# EAGLE board OpenSegment-Panel-v14 (EAGLE 6.5.0), part 1 of 3
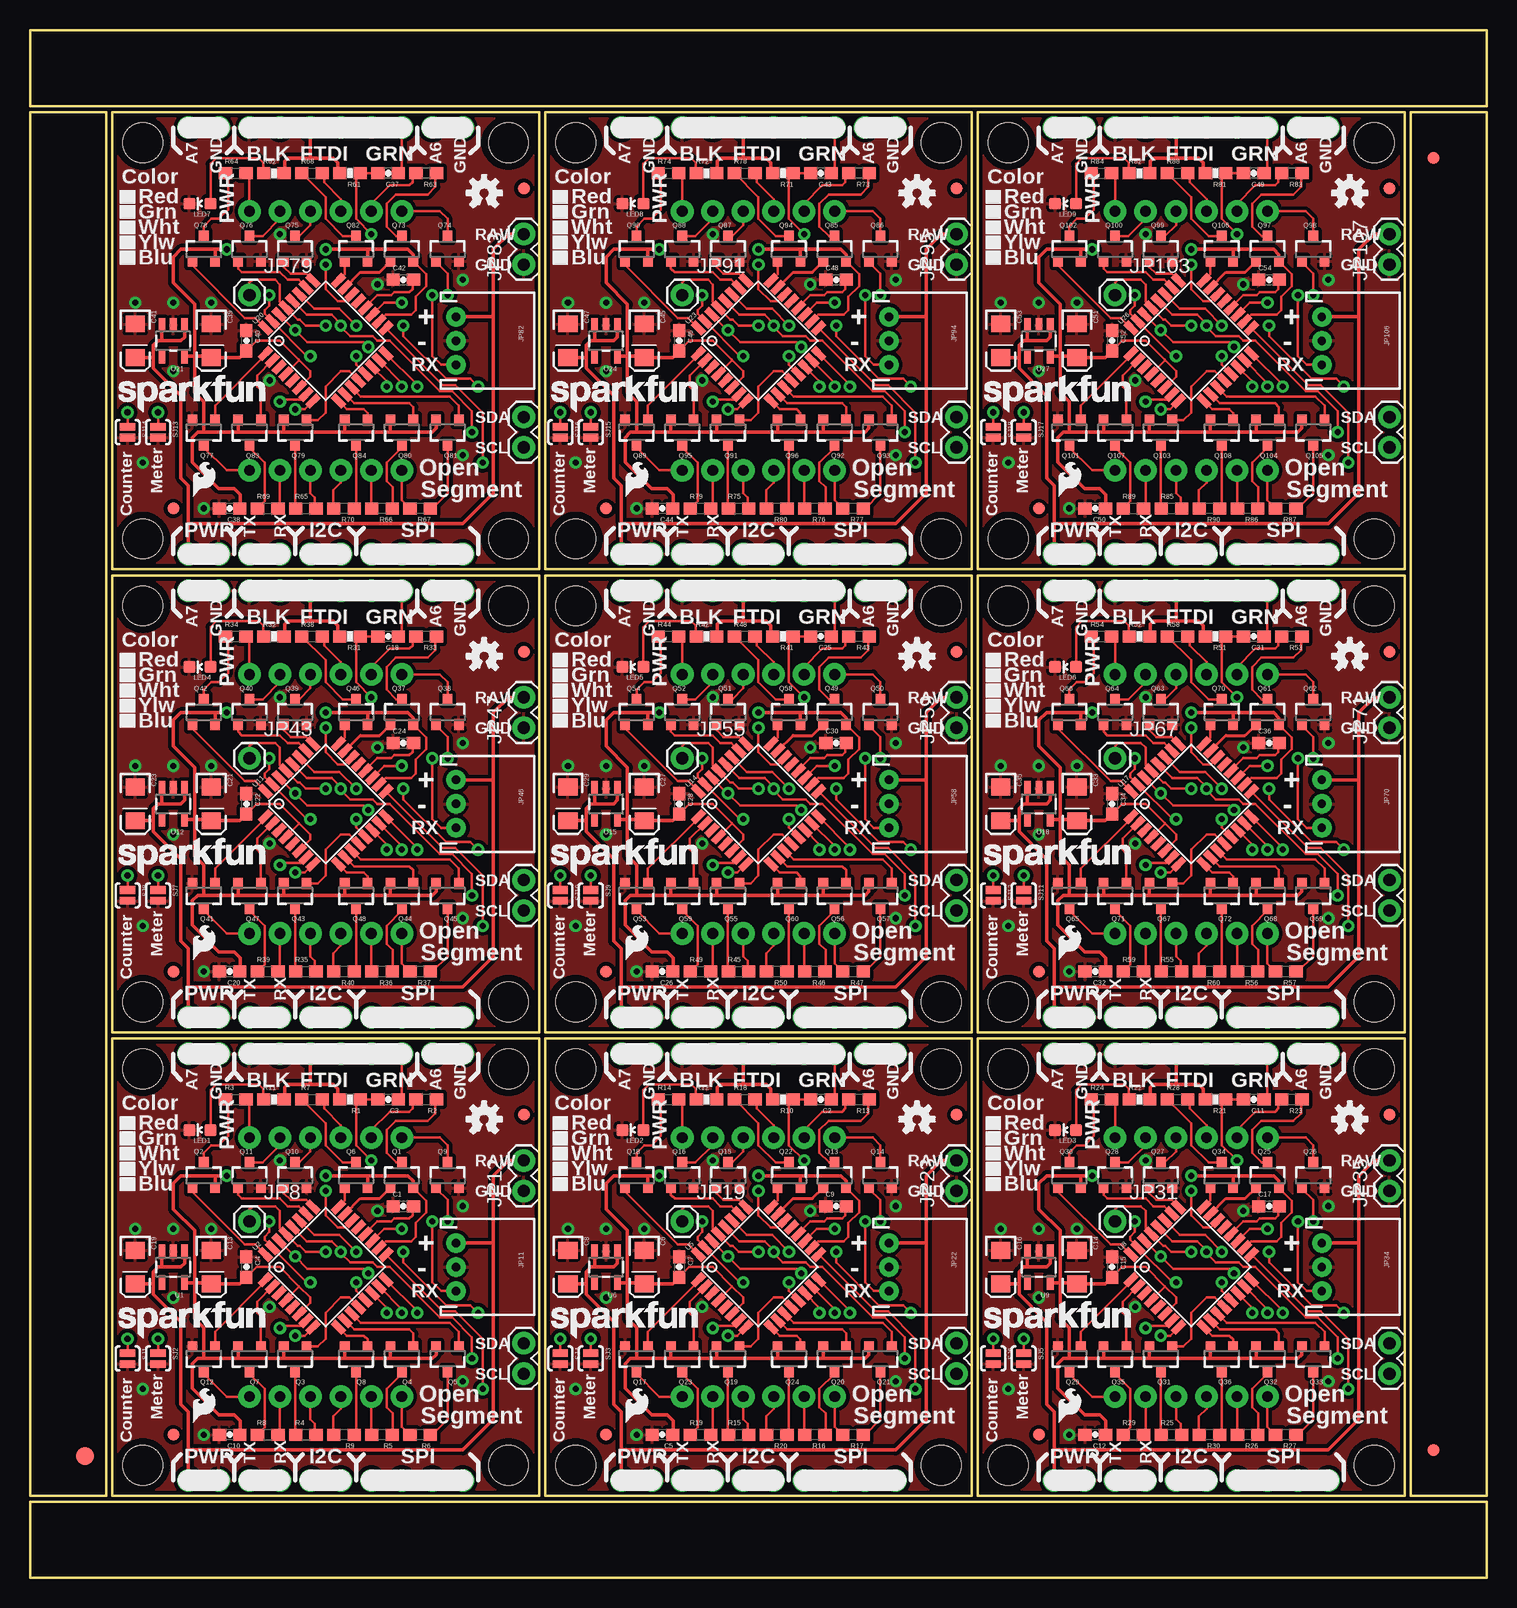
[diagram p0: board, top side]
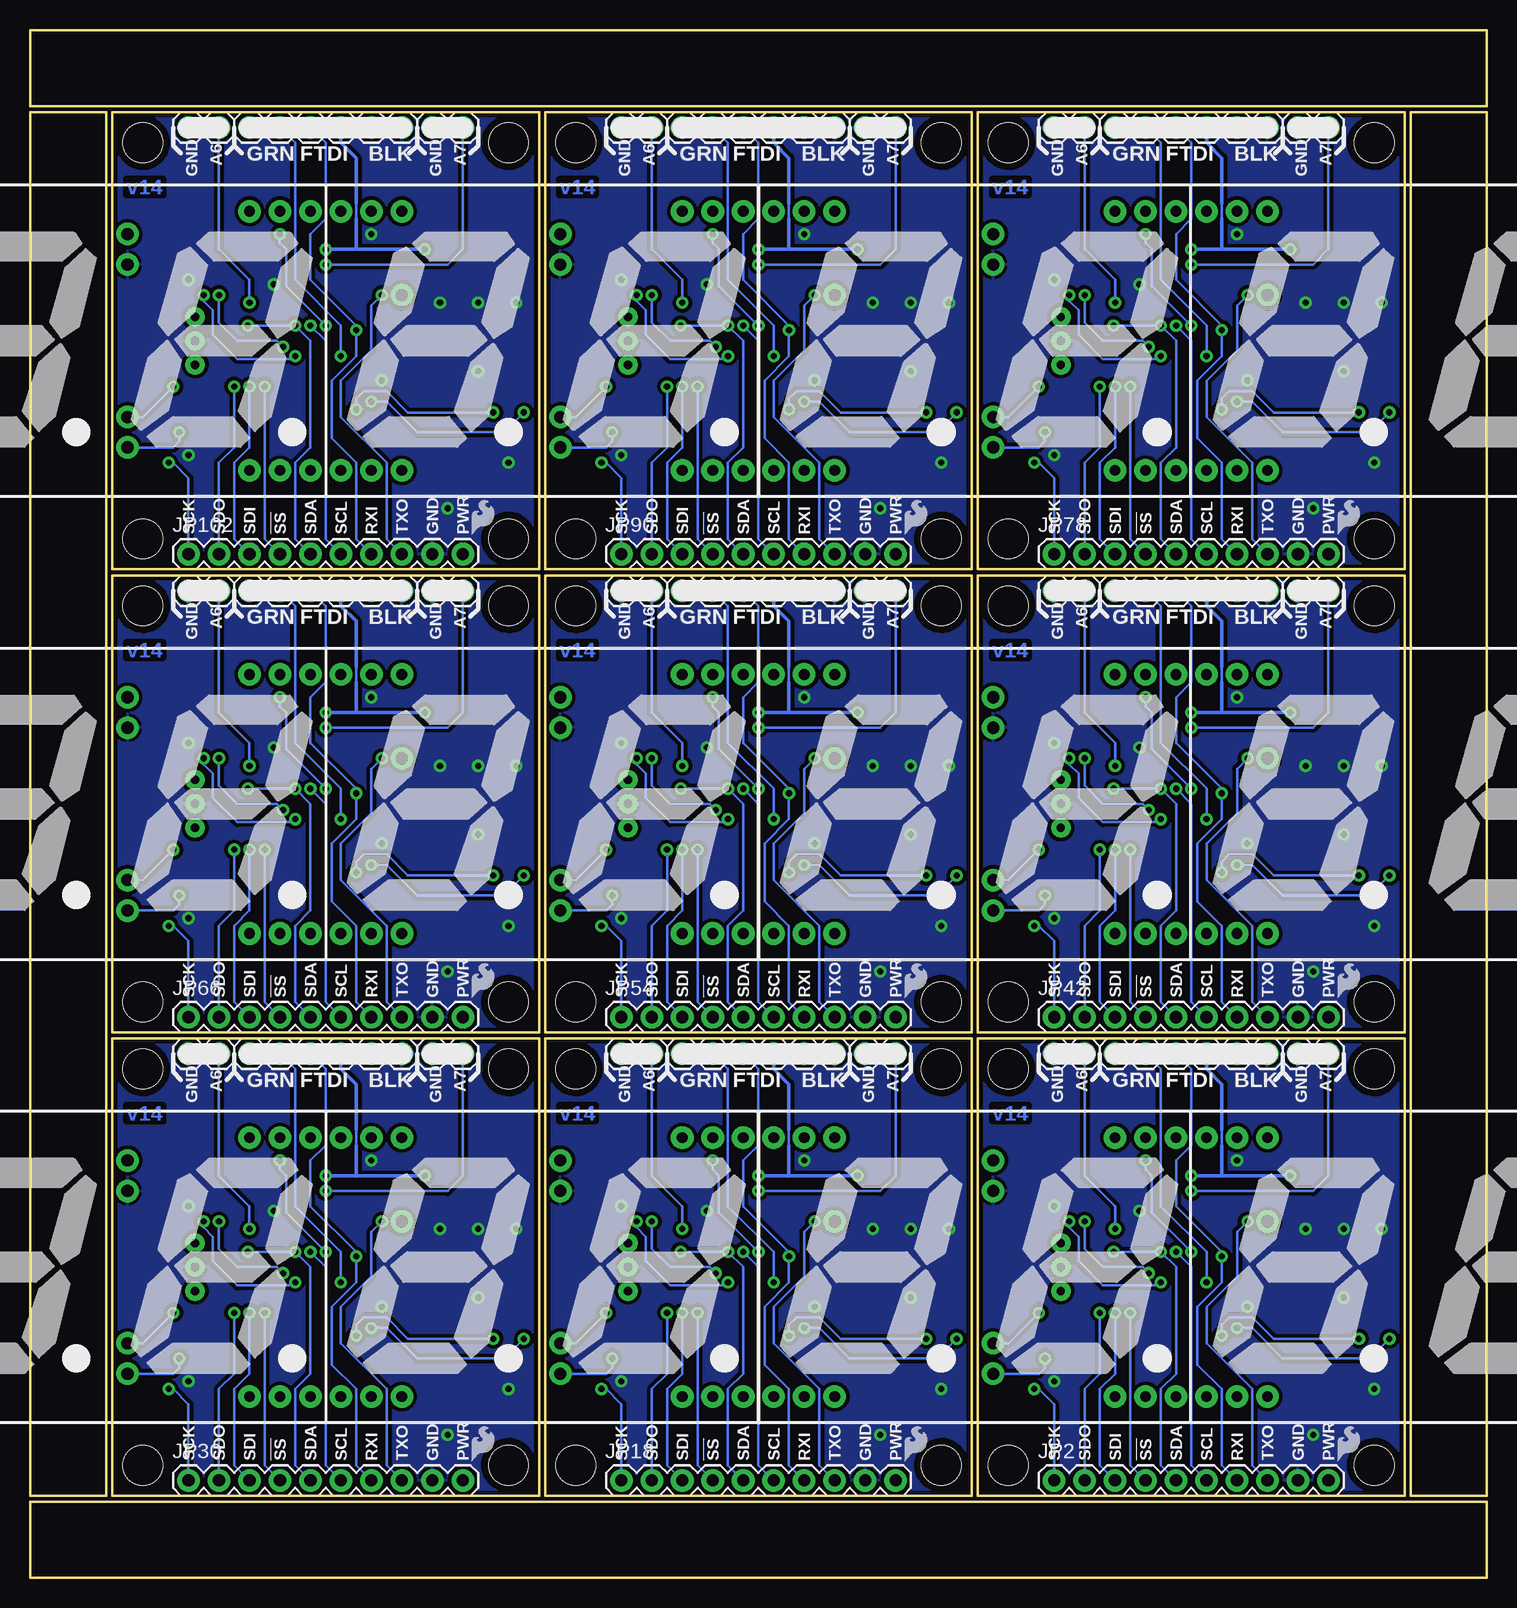
[diagram p1: board, bottom side, seen from below]

Size 121.41 x 129.03 mm. Coordinates in mm from the lower left corner, seen from the top.
Outline: 42.42,44.96 42.42,6.86 6.86,6.86 6.86,44.96 42.42,44.96
Outline: 78.49,44.96 78.49,6.86 42.93,6.86 42.93,44.96 78.49,44.96
Outline: 114.55,44.96 114.55,6.86 78.99,6.86 78.99,44.96 114.55,44.96
Outline: 42.42,83.57 42.42,45.47 6.86,45.47 6.86,83.57 42.42,83.57
Outline: 78.49,83.57 78.49,45.47 42.93,45.47 42.93,83.57 78.49,83.57
Outline: 114.55,83.57 114.55,45.47 78.99,45.47 78.99,83.57 114.55,83.57
Outline: 42.42,122.17 42.42,84.07 6.86,84.07 6.86,122.17 42.42,122.17
Outline: 78.49,122.17 78.49,84.07 42.93,84.07 42.93,122.17 78.49,122.17
Outline: 114.55,122.17 114.55,84.07 78.99,84.07 78.99,122.17 114.55,122.17
Outline: 6.35,6.86 6.35,122.17 0,122.17 0,6.86 6.35,6.86
Outline: 0,0 121.41,0 121.41,6.35 0,6.35 0,0
Outline: 121.41,6.86 121.41,122.17 115.06,122.17 115.06,6.86 121.41,6.86
Outline: 121.41,129.03 0,129.03 0,122.68 121.41,122.68 121.41,129.03
Copper layers (1*16): Top 0.035mm / dielectric 1.5mm / Bottom 0.035mm
Design rules "SparkFun-2-layer": minimum track width 7mil, minimum drill 15mil, track to track 8mil, track to pad 8mil, pad to pad 8mil, via to via 8mil, smd to smd 8mil, copper to edge 8mil, drill to drill 8mil, minimum pad ring 12mil, minimum via ring 10mil, stop-mask expansion 4mil, vias tented up to drill 20mil, thermal gap 10mil
Net classes: 0 default: width 0.203 mm

## Footprints (pad centres in the part's own frame; a part is rotated, then mirrored left to right if it is on the bottom)
0603-CAP = smd 1.1 x 1: 1 -0.85,0; 2 0.85,0
EIA3216 = smd 1.4 x 1.6: A 1.4,0; C -1.4,0
FIDUCIAL-1.5X3 = smd 1.5 x 1.5: 1 0,0
FIDUCIAL-1X2 = smd 1 x 1: 1 0,0
FTDI_BASIC = drill 1.016 pad 1.88: CTS 10.16,0; DTR 0,0; GND 12.7,0; RXI 2.54,0; TXO 5.08,0; VCC 7.62,0
1X10 = drill 1.016 pad 1.88: 1 0,0; 2 2.54,0; 3 5.08,0; 4 7.62,0; 5 10.16,0; 6 12.7,0; 7 15.24,0; 8 17.78,0; 9 20.32,0; 10 22.86,0
STAND-OFF = hole 3.302: 0,0
1X01 = drill 1.016 pad 1.88: 1 0,0
1X02 = drill 1.016 pad 1.88: 1 0,0; 2 2.54,0
JST-3-PTH = drill 0.7 pad 1.626: 1 -2,-5; 2 0,-5; 3 2,-5
LED-0603 = smd 1 x 1: A 0,-0.877; C 0,0.877
SOT23-3 = smd 0.8 x 0.9: 1 -0.95,-1; 2 0.95,-1; 3 0,1.1
0603-RES = smd 1.1 x 1: 1 -0.85,0; 2 0.85,0
0603 = smd 1.1 x 1: 1 -0.85,0; 2 0.85,0
SJ_2S-NO = smd 0.635 x 1.27: 1 -0.45,0; 2 0.45,0
SOT23-5 = smd 0.55 x 1.2: 1 -0.95,-1.3; 2 0,-1.3; 3 0.95,-1.3; 4 0.95,1.3; 5 -0.95,1.3
TQFP32-08 = smd 1.27 x 0.559: 1 -4.293,2.8; 2 -4.293,2; 3 -4.293,1.2; 4 -4.293,0.4; 5 -4.293,-0.4; 6 -4.293,-1.2; 7 -4.293,-2; 8 -4.293,-2.8; 17 4.293,-2.8; 18 4.293,-2; 19 4.293,-1.2; 20 4.293,-0.4; 21 4.293,0.4; 22 4.293,1.2; 23 4.293,2; 24 4.293,2.8 | smd 0.559 x 1.27: 9 -2.8,-4.293; 10 -2,-4.293; 11 -1.2,-4.293; 12 -0.4,-4.293; 13 0.4,-4.293; 14 1.2,-4.293; 15 2,-4.293; 16 2.8,-4.293; 25 2.8,4.293; 26 2,4.293; 27 1.2,4.293; 28 0.4,4.293; 29 -0.4,4.293; 30 -1.2,4.293; 31 -2,4.293; 32 -2.8,4.293
7-SEGMENT-4DIGIT-COUNTER = drill 0.9 pad 1.88: 1 -6.35,-10.795; 2 -3.81,-10.795; 3 -1.27,-10.795; 4 1.27,-10.795; 5 3.81,-10.795; 6 6.35,-10.795; 7 6.35,10.795; 8 3.81,10.795; 9 1.27,10.795; 10 -1.27,10.795; 11 -3.81,10.795; 12 -6.35,10.795

## Placement (x,y rotation side)
C1  0.1uF  [0603-CAP]  31.11,30.99 0 top
C2  0.1uF  [0603-CAP]  65.91,39.88 180 top
C3  0.1uF  [0603-CAP]  29.84,39.88 180 top
C4  0.1uF  [0603-CAP]  18.03,25.91 270 top
C5  1uF  [0603-CAP]  52.7,11.94 180 top
C6  10uF  [EIA3216]  51.18,25.91 270 top
C7  0.1uF  [0603-CAP]  54.1,25.91 270 top
C8  10uF  [EIA3216]  44.83,25.91 270 top
C9  0.1uF  [0603-CAP]  67.18,30.99 0 top
C10  1uF  [0603-CAP]  16.64,11.94 180 top
C11  0.1uF  [0603-CAP]  101.98,39.88 180 top
C12  1uF  [0603-CAP]  88.77,11.94 180 top
C13  10uF  [EIA3216]  15.11,25.91 270 top
C14  10uF  [EIA3216]  87.25,25.91 270 top
C15  0.1uF  [0603-CAP]  90.17,25.91 270 top
C16  10uF  [EIA3216]  80.9,25.91 270 top
C17  0.1uF  [0603-CAP]  103.25,30.99 0 top
C18  0.1uF  [0603-CAP]  29.84,78.49 180 top
C19  10uF  [EIA3216]  8.76,25.91 270 top
C20  1uF  [0603-CAP]  16.64,50.55 180 top
C21  10uF  [EIA3216]  15.11,64.52 270 top
C22  0.1uF  [0603-CAP]  18.03,64.52 270 top
C23  10uF  [EIA3216]  8.76,64.52 270 top
C24  0.1uF  [0603-CAP]  31.11,69.6 0 top
C25  0.1uF  [0603-CAP]  65.91,78.49 180 top
C26  1uF  [0603-CAP]  52.7,50.55 180 top
C27  10uF  [EIA3216]  51.18,64.52 270 top
C28  0.1uF  [0603-CAP]  54.1,64.52 270 top
C29  10uF  [EIA3216]  44.83,64.52 270 top
C30  0.1uF  [0603-CAP]  67.18,69.6 0 top
C31  0.1uF  [0603-CAP]  101.98,78.49 180 top
C32  1uF  [0603-CAP]  88.77,50.55 180 top
C33  10uF  [EIA3216]  87.25,64.52 270 top
C34  0.1uF  [0603-CAP]  90.17,64.52 270 top
C35  10uF  [EIA3216]  80.9,64.52 270 top
C36  0.1uF  [0603-CAP]  103.25,69.6 0 top
C37  0.1uF  [0603-CAP]  29.84,117.09 180 top
C38  1uF  [0603-CAP]  16.64,89.15 180 top
C39  10uF  [EIA3216]  15.11,103.12 270 top
C40  0.1uF  [0603-CAP]  18.03,103.12 270 top
C41  10uF  [EIA3216]  8.76,103.12 270 top
C42  0.1uF  [0603-CAP]  31.11,108.2 0 top
C43  0.1uF  [0603-CAP]  65.91,117.09 180 top
C44  1uF  [0603-CAP]  52.7,89.15 180 top
C45  10uF  [EIA3216]  51.18,103.12 270 top
C46  0.1uF  [0603-CAP]  54.1,103.12 270 top
C47  10uF  [EIA3216]  44.83,103.12 270 top
C48  0.1uF  [0603-CAP]  67.18,108.2 0 top
C49  0.1uF  [0603-CAP]  101.98,117.09 180 top
C50  1uF  [0603-CAP]  88.77,89.15 180 top
C51  10uF  [EIA3216]  87.25,103.12 270 top
C52  0.1uF  [0603-CAP]  90.17,103.12 270 top
C53  10uF  [EIA3216]  80.9,103.12 270 top
C54  0.1uF  [0603-CAP]  103.25,108.2 0 top
E$1  [FIDUCIAL-1.5X3]  4.57,10.16 0 top
E$4  [FIDUCIAL-1X2]  116.97,10.67 0 top
E$5  [FIDUCIAL-1X2]  116.97,118.36 180 top
FID1  FIDUCIAL1X2  [FIDUCIAL-1X2]  41.15,38.61 0 top
FID2  FIDUCIAL1X2  [FIDUCIAL-1X2]  11.94,11.94 0 top
FID3  FIDUCIAL1X2  [FIDUCIAL-1X2]  77.22,38.61 0 top
FID4  FIDUCIAL1X2  [FIDUCIAL-1X2]  48.01,11.94 0 top
FID5  FIDUCIAL1X2  [FIDUCIAL-1X2]  113.28,38.61 0 top
FID6  FIDUCIAL1X2  [FIDUCIAL-1X2]  84.07,11.94 0 top
FID7  FIDUCIAL1X2  [FIDUCIAL-1X2]  41.15,77.22 0 top
FID8  FIDUCIAL1X2  [FIDUCIAL-1X2]  11.94,50.55 0 top
FID9  FIDUCIAL1X2  [FIDUCIAL-1X2]  77.22,77.22 0 top
FID10  FIDUCIAL1X2  [FIDUCIAL-1X2]  48.01,50.55 0 top
FID11  FIDUCIAL1X2  [FIDUCIAL-1X2]  113.28,77.22 0 top
FID12  FIDUCIAL1X2  [FIDUCIAL-1X2]  84.07,50.55 0 top
FID13  FIDUCIAL1X2  [FIDUCIAL-1X2]  41.15,115.82 0 top
FID14  FIDUCIAL1X2  [FIDUCIAL-1X2]  11.94,89.15 0 top
FID15  FIDUCIAL1X2  [FIDUCIAL-1X2]  77.22,115.82 0 top
FID16  FIDUCIAL1X2  [FIDUCIAL-1X2]  48.01,89.15 0 top
FID17  FIDUCIAL1X2  [FIDUCIAL-1X2]  113.28,115.82 0 top
FID18  FIDUCIAL1X2  [FIDUCIAL-1X2]  84.07,89.15 0 top
JP1  FTDI_BASIC  [FTDI_BASIC]  30.99,43.69 0 bottom
JP2  Connections  [1X10]  36.07,8.13 0 bottom
JP3  STAND-OFF  [STAND-OFF]  39.88,42.42 0 top
JP4  STAND-OFF  [STAND-OFF]  9.4,42.42 0 top
JP5  STAND-OFF  [STAND-OFF]  39.88,9.4 0 top
JP6  STAND-OFF  [STAND-OFF]  9.4,9.4 0 top
JP7  FTDI_BASIC  [FTDI_BASIC]  67.06,43.69 0 bottom
JP8  RESET  [1X01]  18.29,29.72 0 top
JP9  [1X02]  36.07,43.69 0 bottom
JP10  [1X02]  15.75,43.69 0 bottom
JP11  Serial  [JST-3-PTH]  40.51,25.91 270 top
JP12  [1X02]  41.15,32.26 90 top
JP13  [1X02]  41.15,19.56 270 top
JP14  STAND-OFF  [STAND-OFF]  75.95,42.42 0 top
JP15  STAND-OFF  [STAND-OFF]  45.47,42.42 0 top
JP16  STAND-OFF  [STAND-OFF]  75.95,9.4 0 top
JP17  STAND-OFF  [STAND-OFF]  45.47,9.4 0 top
JP18  Connections  [1X10]  72.14,8.13 0 bottom
JP19  RESET  [1X01]  54.36,29.72 0 top
JP20  [1X02]  72.14,43.69 0 bottom
JP21  [1X02]  51.82,43.69 0 bottom
JP22  Serial  [JST-3-PTH]  76.58,25.91 270 top
JP23  [1X02]  77.22,32.26 90 top
JP24  [1X02]  77.22,19.56 270 top
JP25  FTDI_BASIC  [FTDI_BASIC]  103.12,43.69 0 bottom
JP26  STAND-OFF  [STAND-OFF]  112.01,42.42 0 top
JP27  STAND-OFF  [STAND-OFF]  81.53,42.42 0 top
JP28  STAND-OFF  [STAND-OFF]  112.01,9.4 0 top
JP29  STAND-OFF  [STAND-OFF]  81.53,9.4 0 top
JP30  Connections  [1X10]  108.2,8.13 0 bottom
JP31  RESET  [1X01]  90.42,29.72 0 top
JP32  [1X02]  108.2,43.69 0 bottom
JP33  [1X02]  87.88,43.69 0 bottom
JP34  Serial  [JST-3-PTH]  112.65,25.91 270 top
JP35  [1X02]  113.28,32.26 90 top
JP36  [1X02]  113.28,19.56 270 top
JP37  FTDI_BASIC  [FTDI_BASIC]  30.99,82.3 0 bottom
JP38  STAND-OFF  [STAND-OFF]  39.88,81.03 0 top
JP39  STAND-OFF  [STAND-OFF]  9.4,81.03 0 top
JP40  STAND-OFF  [STAND-OFF]  39.88,48.01 0 top
JP41  STAND-OFF  [STAND-OFF]  9.4,48.01 0 top
JP42  Connections  [1X10]  36.07,46.74 0 bottom
JP43  RESET  [1X01]  18.29,68.33 0 top
JP44  [1X02]  36.07,82.3 0 bottom
JP45  [1X02]  15.75,82.3 0 bottom
JP46  Serial  [JST-3-PTH]  40.51,64.52 270 top
JP47  [1X02]  41.15,70.87 90 top
JP48  [1X02]  41.15,58.17 270 top
JP49  FTDI_BASIC  [FTDI_BASIC]  67.06,82.3 0 bottom
JP50  STAND-OFF  [STAND-OFF]  75.95,81.03 0 top
JP51  STAND-OFF  [STAND-OFF]  45.47,81.03 0 top
JP52  STAND-OFF  [STAND-OFF]  75.95,48.01 0 top
JP53  STAND-OFF  [STAND-OFF]  45.47,48.01 0 top
JP54  Connections  [1X10]  72.14,46.74 0 bottom
JP55  RESET  [1X01]  54.36,68.33 0 top
JP56  [1X02]  72.14,82.3 0 bottom
JP57  [1X02]  51.82,82.3 0 bottom
JP58  Serial  [JST-3-PTH]  76.58,64.52 270 top
JP59  [1X02]  77.22,70.87 90 top
JP60  [1X02]  77.22,58.17 270 top
JP61  FTDI_BASIC  [FTDI_BASIC]  103.12,82.3 0 bottom
JP62  STAND-OFF  [STAND-OFF]  112.01,81.03 0 top
JP63  STAND-OFF  [STAND-OFF]  81.53,81.03 0 top
JP64  STAND-OFF  [STAND-OFF]  112.01,48.01 0 top
JP65  STAND-OFF  [STAND-OFF]  81.53,48.01 0 top
JP66  Connections  [1X10]  108.2,46.74 0 bottom
JP67  RESET  [1X01]  90.42,68.33 0 top
JP68  [1X02]  108.2,82.3 0 bottom
JP69  [1X02]  87.88,82.3 0 bottom
JP70  Serial  [JST-3-PTH]  112.65,64.52 270 top
JP71  [1X02]  113.28,70.87 90 top
JP72  [1X02]  113.28,58.17 270 top
JP73  FTDI_BASIC  [FTDI_BASIC]  30.99,120.9 0 bottom
JP74  STAND-OFF  [STAND-OFF]  39.88,119.63 0 top
JP75  STAND-OFF  [STAND-OFF]  9.4,119.63 0 top
JP76  STAND-OFF  [STAND-OFF]  39.88,86.61 0 top
JP77  STAND-OFF  [STAND-OFF]  9.4,86.61 0 top
JP78  Connections  [1X10]  36.07,85.34 0 bottom
JP79  RESET  [1X01]  18.29,106.93 0 top
JP80  [1X02]  36.07,120.9 0 bottom
JP81  [1X02]  15.75,120.9 0 bottom
JP82  Serial  [JST-3-PTH]  40.51,103.12 270 top
JP83  [1X02]  41.15,109.47 90 top
JP84  [1X02]  41.15,96.77 270 top
JP85  FTDI_BASIC  [FTDI_BASIC]  67.06,120.9 0 bottom
JP86  STAND-OFF  [STAND-OFF]  75.95,119.63 0 top
JP87  STAND-OFF  [STAND-OFF]  45.47,119.63 0 top
JP88  STAND-OFF  [STAND-OFF]  75.95,86.61 0 top
JP89  STAND-OFF  [STAND-OFF]  45.47,86.61 0 top
JP90  Connections  [1X10]  72.14,85.34 0 bottom
JP91  RESET  [1X01]  54.36,106.93 0 top
JP92  [1X02]  72.14,120.9 0 bottom
JP93  [1X02]  51.82,120.9 0 bottom
JP94  Serial  [JST-3-PTH]  76.58,103.12 270 top
JP95  [1X02]  77.22,109.47 90 top
JP96  [1X02]  77.22,96.77 270 top
JP97  FTDI_BASIC  [FTDI_BASIC]  103.12,120.9 0 bottom
JP98  STAND-OFF  [STAND-OFF]  112.01,119.63 0 top
JP99  STAND-OFF  [STAND-OFF]  81.53,119.63 0 top
JP100  STAND-OFF  [STAND-OFF]  112.01,86.61 0 top
JP101  STAND-OFF  [STAND-OFF]  81.53,86.61 0 top
JP102  Connections  [1X10]  108.2,85.34 0 bottom
JP103  RESET  [1X01]  90.42,106.93 0 top
JP104  [1X02]  108.2,120.9 0 bottom
JP105  [1X02]  87.88,120.9 0 bottom
JP106  Serial  [JST-3-PTH]  112.65,103.12 270 top
JP107  [1X02]  113.28,109.47 90 top
JP108  [1X02]  113.28,96.77 270 top
LED1  Red  [LED-0603]  14.17,37.34 90 top
LED2  Red  [LED-0603]  50.24,37.34 90 top
LED3  Red  [LED-0603]  86.3,37.34 90 top
LED4  Red  [LED-0603]  14.17,75.95 90 top
LED5  Red  [LED-0603]  50.24,75.95 90 top
LED6  Red  [LED-0603]  86.3,75.95 90 top
LED7  Red  [LED-0603]  14.17,114.55 90 top
LED8  Red  [LED-0603]  50.24,114.55 90 top
LED9  Red  [LED-0603]  86.3,114.55 90 top
Q1  PNP  [SOT23-3]  30.99,33.53 0 top
Q2  PNP  [SOT23-3]  14.48,33.53 0 top
Q3  PNP  [SOT23-3]  22.1,18.29 180 top
Q4  PNP  [SOT23-3]  30.99,18.29 180 top
Q5  PNP  [SOT23-3]  34.8,18.29 180 top
Q6  PNP  [SOT23-3]  27.18,33.53 0 top
Q7  PNP  [SOT23-3]  18.29,18.29 180 top
Q8  PNP  [SOT23-3]  27.18,18.29 180 top
Q9  MMBT2222  [SOT23-3]  34.8,33.53 0 top
Q10  MMBT2222  [SOT23-3]  22.1,33.53 0 top
Q11  MMBT2222  [SOT23-3]  18.29,33.53 0 top
Q12  MMBT2222  [SOT23-3]  14.48,18.29 180 top
Q13  PNP  [SOT23-3]  67.06,33.53 0 top
Q14  MMBT2222  [SOT23-3]  70.87,33.53 0 top
Q15  MMBT2222  [SOT23-3]  58.17,33.53 0 top
Q16  MMBT2222  [SOT23-3]  54.36,33.53 0 top
Q17  MMBT2222  [SOT23-3]  50.55,18.29 180 top
Q18  PNP  [SOT23-3]  50.55,33.53 0 top
Q19  PNP  [SOT23-3]  58.17,18.29 180 top
Q20  PNP  [SOT23-3]  67.06,18.29 180 top
Q21  PNP  [SOT23-3]  70.87,18.29 180 top
Q22  PNP  [SOT23-3]  63.25,33.53 0 top
Q23  PNP  [SOT23-3]  54.36,18.29 180 top
Q24  PNP  [SOT23-3]  63.25,18.29 180 top
Q25  PNP  [SOT23-3]  103.12,33.53 0 top
Q26  MMBT2222  [SOT23-3]  106.93,33.53 0 top
Q27  MMBT2222  [SOT23-3]  94.23,33.53 0 top
Q28  MMBT2222  [SOT23-3]  90.42,33.53 0 top
Q29  MMBT2222  [SOT23-3]  86.61,18.29 180 top
Q30  PNP  [SOT23-3]  86.61,33.53 0 top
Q31  PNP  [SOT23-3]  94.23,18.29 180 top
Q32  PNP  [SOT23-3]  103.12,18.29 180 top
Q33  PNP  [SOT23-3]  106.93,18.29 180 top
Q34  PNP  [SOT23-3]  99.31,33.53 0 top
Q35  PNP  [SOT23-3]  90.42,18.29 180 top
Q36  PNP  [SOT23-3]  99.31,18.29 180 top
Q37  PNP  [SOT23-3]  30.99,72.14 0 top
Q38  MMBT2222  [SOT23-3]  34.8,72.14 0 top
Q39  MMBT2222  [SOT23-3]  22.1,72.14 0 top
Q40  MMBT2222  [SOT23-3]  18.29,72.14 0 top
Q41  MMBT2222  [SOT23-3]  14.48,56.9 180 top
Q42  PNP  [SOT23-3]  14.48,72.14 0 top
Q43  PNP  [SOT23-3]  22.1,56.9 180 top
Q44  PNP  [SOT23-3]  30.99,56.9 180 top
Q45  PNP  [SOT23-3]  34.8,56.9 180 top
Q46  PNP  [SOT23-3]  27.18,72.14 0 top
Q47  PNP  [SOT23-3]  18.29,56.9 180 top
Q48  PNP  [SOT23-3]  27.18,56.9 180 top
Q49  PNP  [SOT23-3]  67.06,72.14 0 top
Q50  MMBT2222  [SOT23-3]  70.87,72.14 0 top
Q51  MMBT2222  [SOT23-3]  58.17,72.14 0 top
Q52  MMBT2222  [SOT23-3]  54.36,72.14 0 top
Q53  MMBT2222  [SOT23-3]  50.55,56.9 180 top
Q54  PNP  [SOT23-3]  50.55,72.14 0 top
Q55  PNP  [SOT23-3]  58.17,56.9 180 top
Q56  PNP  [SOT23-3]  67.06,56.9 180 top
Q57  PNP  [SOT23-3]  70.87,56.9 180 top
Q58  PNP  [SOT23-3]  63.25,72.14 0 top
Q59  PNP  [SOT23-3]  54.36,56.9 180 top
Q60  PNP  [SOT23-3]  63.25,56.9 180 top
Q61  PNP  [SOT23-3]  103.12,72.14 0 top
Q62  MMBT2222  [SOT23-3]  106.93,72.14 0 top
Q63  MMBT2222  [SOT23-3]  94.23,72.14 0 top
Q64  MMBT2222  [SOT23-3]  90.42,72.14 0 top
Q65  MMBT2222  [SOT23-3]  86.61,56.9 180 top
Q66  PNP  [SOT23-3]  86.61,72.14 0 top
Q67  PNP  [SOT23-3]  94.23,56.9 180 top
Q68  PNP  [SOT23-3]  103.12,56.9 180 top
Q69  PNP  [SOT23-3]  106.93,56.9 180 top
Q70  PNP  [SOT23-3]  99.31,72.14 0 top
Q71  PNP  [SOT23-3]  90.42,56.9 180 top
Q72  PNP  [SOT23-3]  99.31,56.9 180 top
Q73  PNP  [SOT23-3]  30.99,110.74 0 top
Q74  MMBT2222  [SOT23-3]  34.8,110.74 0 top
Q75  MMBT2222  [SOT23-3]  22.1,110.74 0 top
Q76  MMBT2222  [SOT23-3]  18.29,110.74 0 top
Q77  MMBT2222  [SOT23-3]  14.48,95.5 180 top
Q78  PNP  [SOT23-3]  14.48,110.74 0 top
Q79  PNP  [SOT23-3]  22.1,95.5 180 top
Q80  PNP  [SOT23-3]  30.99,95.5 180 top
Q81  PNP  [SOT23-3]  34.8,95.5 180 top
Q82  PNP  [SOT23-3]  27.18,110.74 0 top
Q83  PNP  [SOT23-3]  18.29,95.5 180 top
Q84  PNP  [SOT23-3]  27.18,95.5 180 top
Q85  PNP  [SOT23-3]  67.06,110.74 0 top
Q86  MMBT2222  [SOT23-3]  70.87,110.74 0 top
Q87  MMBT2222  [SOT23-3]  58.17,110.74 0 top
Q88  MMBT2222  [SOT23-3]  54.36,110.74 0 top
Q89  MMBT2222  [SOT23-3]  50.55,95.5 180 top
Q90  PNP  [SOT23-3]  50.55,110.74 0 top
Q91  PNP  [SOT23-3]  58.17,95.5 180 top
Q92  PNP  [SOT23-3]  67.06,95.5 180 top
Q93  PNP  [SOT23-3]  70.87,95.5 180 top
Q94  PNP  [SOT23-3]  63.25,110.74 0 top
Q95  PNP  [SOT23-3]  54.36,95.5 180 top
Q96  PNP  [SOT23-3]  63.25,95.5 180 top
Q97  PNP  [SOT23-3]  103.12,110.74 0 top
Q98  MMBT2222  [SOT23-3]  106.93,110.74 0 top
Q99  MMBT2222  [SOT23-3]  94.23,110.74 0 top
Q100  MMBT2222  [SOT23-3]  90.42,110.74 0 top
Q101  MMBT2222  [SOT23-3]  86.61,95.5 180 top
Q102  PNP  [SOT23-3]  86.61,110.74 0 top
Q103  PNP  [SOT23-3]  94.23,95.5 180 top
Q104  PNP  [SOT23-3]  103.12,95.5 180 top
Q105  PNP  [SOT23-3]  106.93,95.5 180 top
Q106  PNP  [SOT23-3]  99.31,110.74 0 top
Q107  PNP  [SOT23-3]  90.42,95.5 180 top
Q108  PNP  [SOT23-3]  99.31,95.5 180 top
R1  10k  [0603-RES]  26.67,39.88 180 top
R2  33/68  [0603]  33.02,39.88 180 top
R3  33/68  [0603]  17.14,39.88 0 top
R4  33/68  [0603]  22.99,11.94 0 top
R5  33/68  [0603]  29.34,11.94 180 top
R6  33/68  [0603]  32.51,11.94 180 top
R7  33/68  [0603]  23.5,39.88 0 top
R8  33/68  [0603]  19.81,11.94 0 top
R9  33/68  [0603]  26.16,11.94 180 top
R10  10k  [0603-RES]  62.74,39.88 180 top
R11  330  [0603-RES]  20.32,39.88 0 top
R12  330  [0603-RES]  56.39,39.88 0 top
R13  33/68  [0603]  69.09,39.88 180 top
R14  33/68  [0603]  53.21,39.88 0 top
R15  33/68  [0603]  59.05,11.94 0 top
R16  33/68  [0603]  65.41,11.94 180 top
R17  33/68  [0603]  68.58,11.94 180 top
R18  33/68  [0603]  59.56,39.88 0 top
R19  33/68  [0603]  55.88,11.94 0 top
R20  33/68  [0603]  62.23,11.94 180 top
R21  10k  [0603-RES]  98.81,39.88 180 top
R22  330  [0603-RES]  92.46,39.88 0 top
R23  33/68  [0603]  105.16,39.88 180 top
R24  33/68  [0603]  89.28,39.88 0 top
R25  33/68  [0603]  95.12,11.94 0 top
R26  33/68  [0603]  101.47,11.94 180 top
R27  33/68  [0603]  104.65,11.94 180 top
R28  33/68  [0603]  95.63,39.88 0 top
R29  33/68  [0603]  91.95,11.94 0 top
R30  33/68  [0603]  98.3,11.94 180 top
R31  10k  [0603-RES]  26.67,78.49 180 top
R32  330  [0603-RES]  20.32,78.49 0 top
R33  33/68  [0603]  33.02,78.49 180 top
R34  33/68  [0603]  17.14,78.49 0 top
R35  33/68  [0603]  22.99,50.55 0 top
R36  33/68  [0603]  29.34,50.55 180 top
R37  33/68  [0603]  32.51,50.55 180 top
R38  33/68  [0603]  23.5,78.49 0 top
R39  33/68  [0603]  19.81,50.55 0 top
R40  33/68  [0603]  26.16,50.55 180 top
R41  10k  [0603-RES]  62.74,78.49 180 top
R42  330  [0603-RES]  56.39,78.49 0 top
R43  33/68  [0603]  69.09,78.49 180 top
R44  33/68  [0603]  53.21,78.49 0 top
R45  33/68  [0603]  59.05,50.55 0 top
R46  33/68  [0603]  65.41,50.55 180 top
R47  33/68  [0603]  68.58,50.55 180 top
R48  33/68  [0603]  59.56,78.49 0 top
R49  33/68  [0603]  55.88,50.55 0 top
R50  33/68  [0603]  62.23,50.55 180 top
R51  10k  [0603-RES]  98.81,78.49 180 top
R52  330  [0603-RES]  92.46,78.49 0 top
R53  33/68  [0603]  105.16,78.49 180 top
R54  33/68  [0603]  89.28,78.49 0 top
R55  33/68  [0603]  95.12,50.55 0 top
R56  33/68  [0603]  101.47,50.55 180 top
R57  33/68  [0603]  104.65,50.55 180 top
R58  33/68  [0603]  95.63,78.49 0 top
R59  33/68  [0603]  91.95,50.55 0 top
R60  33/68  [0603]  98.3,50.55 180 top
R61  10k  [0603-RES]  26.67,117.09 180 top
R62  330  [0603-RES]  20.32,117.09 0 top
R63  33/68  [0603]  33.02,117.09 180 top
R64  33/68  [0603]  17.14,117.09 0 top
R65  33/68  [0603]  22.99,89.15 0 top
R66  33/68  [0603]  29.34,89.15 180 top
R67  33/68  [0603]  32.51,89.15 180 top
R68  33/68  [0603]  23.5,117.09 0 top
R69  33/68  [0603]  19.81,89.15 0 top
R70  33/68  [0603]  26.16,89.15 180 top
R71  10k  [0603-RES]  62.74,117.09 180 top
R72  330  [0603-RES]  56.39,117.09 0 top
R73  33/68  [0603]  69.09,117.09 180 top
R74  33/68  [0603]  53.21,117.09 0 top
R75  33/68  [0603]  59.05,89.15 0 top
R76  33/68  [0603]  65.41,89.15 180 top
R77  33/68  [0603]  68.58,89.15 180 top
R78  33/68  [0603]  59.56,117.09 0 top
R79  33/68  [0603]  55.88,89.15 0 top
R80  33/68  [0603]  62.23,89.15 180 top
R81  10k  [0603-RES]  98.81,117.09 180 top
R82  330  [0603-RES]  92.46,117.09 0 top
R83  33/68  [0603]  105.16,117.09 180 top
R84  33/68  [0603]  89.28,117.09 0 top
R85  33/68  [0603]  95.12,89.15 0 top
R86  33/68  [0603]  101.47,89.15 180 top
R87  33/68  [0603]  104.65,89.15 180 top
R88  33/68  [0603]  95.63,117.09 0 top
R89  33/68  [0603]  91.95,89.15 0 top
R90  33/68  [0603]  98.3,89.15 180 top
SJ1  Counter Ctl  [SJ_2S-NO]  8.13,18.29 270 top
SJ2  Counter Ctl  [SJ_2S-NO]  10.67,18.29 270 top
SJ3  Counter Ctl  [SJ_2S-NO]  46.74,18.29 270 top
SJ4  Counter Ctl  [SJ_2S-NO]  44.2,18.29 270 top
SJ5  Counter Ctl  [SJ_2S-NO]  82.8,18.29 270 top
SJ6  Counter Ctl  [SJ_2S-NO]  80.26,18.29 270 top
SJ7  Counter Ctl  [SJ_2S-NO]  10.67,56.9 270 top
SJ8  Counter Ctl  [SJ_2S-NO]  8.13,56.9 270 top
SJ9  Counter Ctl  [SJ_2S-NO]  46.74,56.9 270 top
SJ10  Counter Ctl  [SJ_2S-NO]  44.2,56.9 270 top
SJ11  Counter Ctl  [SJ_2S-NO]  82.8,56.9 270 top
SJ12  Counter Ctl  [SJ_2S-NO]  80.26,56.9 270 top
SJ13  Counter Ctl  [SJ_2S-NO]  10.67,95.5 270 top
SJ14  Counter Ctl  [SJ_2S-NO]  8.13,95.5 270 top
SJ15  Counter Ctl  [SJ_2S-NO]  46.74,95.5 270 top
SJ16  Counter Ctl  [SJ_2S-NO]  44.2,95.5 270 top
SJ17  Counter Ctl  [SJ_2S-NO]  82.8,95.5 270 top
SJ18  Counter Ctl  [SJ_2S-NO]  80.26,95.5 270 top
U1  MIC5219  [SOT23-5]  11.94,25.91 180 top
U2  ATMEGA328  [TQFP32-08]  24.64,25.91 45 top
U3  7-SEGMENT-4DIGIT-COUNTERPTH  [7-SEGMENT-4DIGIT-COUNTER]  24.64,25.91 0 bottom
U4  7-SEGMENT-4DIGIT-COUNTERPTH  [7-SEGMENT-4DIGIT-COUNTER]  60.71,25.91 0 bottom
U5  ATMEGA328  [TQFP32-08]  60.71,25.91 45 top
U6  MIC5219  [SOT23-5]  48.01,25.91 180 top
U7  7-SEGMENT-4DIGIT-COUNTERPTH  [7-SEGMENT-4DIGIT-COUNTER]  96.77,25.91 0 bottom
U8  ATMEGA328  [TQFP32-08]  96.77,25.91 45 top
U9  MIC5219  [SOT23-5]  84.07,25.91 180 top
U10  7-SEGMENT-4DIGIT-COUNTERPTH  [7-SEGMENT-4DIGIT-COUNTER]  24.64,64.52 0 bottom
U11  ATMEGA328  [TQFP32-08]  24.64,64.52 45 top
U12  MIC5219  [SOT23-5]  11.94,64.52 180 top
U13  7-SEGMENT-4DIGIT-COUNTERPTH  [7-SEGMENT-4DIGIT-COUNTER]  60.71,64.52 0 bottom
U14  ATMEGA328  [TQFP32-08]  60.71,64.52 45 top
U15  MIC5219  [SOT23-5]  48.01,64.52 180 top
U16  7-SEGMENT-4DIGIT-COUNTERPTH  [7-SEGMENT-4DIGIT-COUNTER]  96.77,64.52 0 bottom
U17  ATMEGA328  [TQFP32-08]  96.77,64.52 45 top
U18  MIC5219  [SOT23-5]  84.07,64.52 180 top
U19  7-SEGMENT-4DIGIT-COUNTERPTH  [7-SEGMENT-4DIGIT-COUNTER]  24.64,103.12 0 bottom
U20  ATMEGA328  [TQFP32-08]  24.64,103.12 45 top
U21  MIC5219  [SOT23-5]  11.94,103.12 180 top
U22  7-SEGMENT-4DIGIT-COUNTERPTH  [7-SEGMENT-4DIGIT-COUNTER]  60.71,103.12 0 bottom
U23  ATMEGA328  [TQFP32-08]  60.71,103.12 45 top
U24  MIC5219  [SOT23-5]  48.01,103.12 180 top
U25  7-SEGMENT-4DIGIT-COUNTERPTH  [7-SEGMENT-4DIGIT-COUNTER]  96.77,103.12 0 bottom
U26  ATMEGA328  [TQFP32-08]  96.77,103.12 45 top
U27  MIC5219  [SOT23-5]  84.07,103.12 180 top
U$1  LOGO-SFESK  [SFE-LOGO-FLAME]  12.45,9.78 0 bottom
U$2  LOGO-SFESK  [SFE-LOGO-FLAME]  13.59,12.95 0 top
U$3  LOGO-SFENW2  [SFE-NEW-WEB]  43.43,19.94 0 top
U$4  OSHW-LOGOS  [OSHW-LOGO-S]  37.85,38.23 0 top
U$5  LOGO-SFESK  [SFE-LOGO-FLAME]  48.51,9.78 0 bottom
U$6  LOGO-SFESK  [SFE-LOGO-FLAME]  49.66,12.95 0 top
U$7  LOGO-SFENW2  [SFE-NEW-WEB]  7.37,19.94 0 top
U$8  OSHW-LOGOS  [OSHW-LOGO-S]  73.91,38.23 0 top
U$9  LOGO-SFENW2  [SFE-NEW-WEB]  79.5,19.94 0 top
U$10  LOGO-SFESK  [SFE-LOGO-FLAME]  84.58,9.78 0 bottom
U$11  LOGO-SFESK  [SFE-LOGO-FLAME]  85.72,12.95 0 top
U$12  OSHW-LOGOS  [OSHW-LOGO-S]  109.98,38.23 0 top
U$13  LOGO-SFENW2  [SFE-NEW-WEB]  7.37,58.55 0 top
U$14  LOGO-SFESK  [SFE-LOGO-FLAME]  12.45,48.39 0 bottom
U$15  LOGO-SFESK  [SFE-LOGO-FLAME]  13.59,51.56 0 top
U$16  OSHW-LOGOS  [OSHW-LOGO-S]  37.85,76.83 0 top
U$17  LOGO-SFENW2  [SFE-NEW-WEB]  43.43,58.55 0 top
U$18  LOGO-SFESK  [SFE-LOGO-FLAME]  48.51,48.39 0 bottom
U$19  LOGO-SFESK  [SFE-LOGO-FLAME]  49.66,51.56 0 top
U$20  OSHW-LOGOS  [OSHW-LOGO-S]  73.91,76.83 0 top
U$21  LOGO-SFENW2  [SFE-NEW-WEB]  79.5,58.55 0 top
U$22  LOGO-SFESK  [SFE-LOGO-FLAME]  84.58,48.39 0 bottom
U$23  LOGO-SFESK  [SFE-LOGO-FLAME]  85.72,51.56 0 top
U$24  OSHW-LOGOS  [OSHW-LOGO-S]  109.98,76.83 0 top
U$25  LOGO-SFENW2  [SFE-NEW-WEB]  7.37,97.16 0 top
U$26  LOGO-SFESK  [SFE-LOGO-FLAME]  12.45,87 0 bottom
U$27  LOGO-SFESK  [SFE-LOGO-FLAME]  13.59,90.17 0 top
U$28  OSHW-LOGOS  [OSHW-LOGO-S]  37.85,115.44 0 top
U$29  LOGO-SFENW2  [SFE-NEW-WEB]  43.43,97.16 0 top
U$30  LOGO-SFESK  [SFE-LOGO-FLAME]  48.51,87 0 bottom
U$31  LOGO-SFESK  [SFE-LOGO-FLAME]  49.66,90.17 0 top
U$32  OSHW-LOGOS  [OSHW-LOGO-S]  73.91,115.44 0 top
U$33  LOGO-SFENW2  [SFE-NEW-WEB]  79.5,97.16 0 top
U$34  LOGO-SFESK  [SFE-LOGO-FLAME]  84.58,87 0 bottom
U$35  LOGO-SFESK  [SFE-LOGO-FLAME]  85.72,90.17 0 top
U$36  OSHW-LOGOS  [OSHW-LOGO-S]  109.98,115.44 0 top

## Library data of the parts
C1-C4 C7 C9 C11 C15 C17 C18 C22 C24 C25 C28 C30 C31 C34 C36 C37 C40 C42 C43 C46 C48 C49 C52 C54 = SparkFun-Capacitors; PROD_ID: CAP-00810
C5 C10 C12 C20 C26 C32 C38 C44 C50 = SparkFun-Capacitors; PROD_ID: CAP-00868
C6 C8 C13 C14 C16 C19 C21 C23 C27 C29 C33 C35 C39 C41 C45 C47 C51 C53 JP1 JP7 JP25 JP37 JP49 JP61 JP73 JP85 JP97 U1 U6 U9 U12 U15 U18 U21 U24 U27 U$1-U$3 U$5-U$7 U$9-U$11 U$13-U$15 U$17-U$19 U$21-U$23 U$25-U$27 U$29-U$31 U$33-U$35 = SparkFun
E$1 = SparkFun-Retired
E$4 E$5 FID1-FID18 U$4 U$8 U$12 U$16 U$20 U$24 U$28 U$32 U$36 = SparkFun-Aesthetics
JP2 JP8-JP13 JP18-JP24 JP30-JP36 JP42-JP48 JP54-JP60 JP66-JP72 JP78-JP84 JP90-JP96 JP102-JP108 = SparkFun-Connectors
JP3-JP6 JP14-JP17 JP26-JP29 JP38-JP41 JP50-JP53 JP62-JP65 JP74-JP77 JP86-JP89 JP98-JP101 = SparkFun-Electromechanical
LED1-LED9 = SparkFun-LED; PROD_ID: DIO-00819
Q1-Q108 = SparkFun-DiscreteSemi
R1 R10 R21 R31 R41 R51 R61 R71 R81 = SparkFun-Resistors; PROD_ID: RES-00824
R2-R9 R13-R20 R23-R30 R33-R40 R43-R50 R53-R60 R63-R70 R73-R80 R83-R90 = SparkFun-Resistors; PROD_ID: RES-08270
R11 R12 R22 R32 R42 R52 R62 R72 R82 = SparkFun-Resistors; PROD_ID: RES-00818
SJ1-SJ18 = SparkFun-Passives
U2 U5 U8 U11 U14 U17 U20 U23 U26 = SparkFun-DigitalIC
U3 U4 U7 U10 U13 U16 U19 U22 U25 = SparkFun-Displays

## Nets
!SS: JP2.4 U2.14
!SS1: JP18.4 U5.14
!SS2: JP30.4 U8.14
!SS3: JP42.4 U11.14
!SS4: JP54.4 U14.14
!SS5: JP66.4 U17.14
!SS6: JP78.4 U20.14
!SS7: JP90.4 U23.14
!SS8: JP102.4 U26.14
A1: JP20.2 U5.19
A2: JP21.2 U5.22
A3: JP32.2 U8.19
A4: JP33.2 U8.22
A5: JP44.2 U11.19
A6: JP9.2 U2.19
A7: JP10.2 U2.22
A8: JP45.2 U11.22
A9: JP56.2 U14.19
A10: JP57.2 U14.22
A11: JP68.2 U17.19
A12: JP69.2 U17.22
A13: JP80.2 U20.19
A14: JP81.2 U20.22
A15: JP92.2 U23.19
A16: JP93.2 U23.22
A17: JP104.2 U26.19
A18: JP105.2 U26.22
ANALOG: SJ2.1 U2.8
ANALOG1: SJ3.1 U5.8
ANALOG2: SJ5.1 U8.8
ANALOG3: SJ7.1 U11.8
ANALOG4: SJ9.1 U14.8
ANALOG5: SJ11.1 U17.8
ANALOG6: SJ13.1 U20.8
ANALOG7: SJ15.1 U23.8
ANALOG8: SJ17.1 U26.8
C-DIG1: Q9.1 U2.13
C-DIG2: Q10.1 U2.25
C-DIG3: Q11.1 U2.26
C-DIG4: Q12.1 U2.1
C-DIG5: Q14.1 U5.13
C-DIG6: Q15.1 U5.25
C-DIG7: Q16.1 U5.26
C-DIG8: Q17.1 U5.1
C-DIG9: Q26.1 U8.13
C-DIG10: Q27.1 U8.25
C-DIG11: Q28.1 U8.26
C-DIG12: Q29.1 U8.1
C-DIG13: Q38.1 U11.13
C-DIG14: Q39.1 U11.25
C-DIG15: Q40.1 U11.26
C-DIG16: Q41.1 U11.1
C-DIG17: Q50.1 U14.13
C-DIG18: Q51.1 U14.25
C-DIG19: Q52.1 U14.26
C-DIG20: Q53.1 U14.1
C-DIG21: Q62.1 U17.13
C-DIG22: Q63.1 U17.25
C-DIG23: Q64.1 U17.26
C-DIG24: Q65.1 U17.1
C-DIG25: Q74.1 U20.13
C-DIG26: Q75.1 U20.25
C-DIG27: Q76.1 U20.26
C-DIG28: Q77.1 U20.1
C-DIG29: Q86.1 U23.13
C-DIG30: Q87.1 U23.25
C-DIG31: Q88.1 U23.26
C-DIG32: Q89.1 U23.1
C-DIG33: Q98.1 U26.13
C-DIG34: Q99.1 U26.25
C-DIG35: Q100.1 U26.26
C-DIG36: Q101.1 U26.1
C-SEGA: Q1.1 U2.23
C-SEGA1: Q13.1 U5.23
C-SEGA2: Q25.1 U8.23
C-SEGA3: Q37.1 U11.23
C-SEGA4: Q49.1 U14.23
C-SEGA5: Q61.1 U17.23
C-SEGA6: Q73.1 U20.23
C-SEGA7: Q85.1 U23.23
C-SEGA8: Q97.1 U26.23
C-SEGB: Q2.1 U2.32
C-SEGB1: Q18.1 U5.32
C-SEGB2: Q30.1 U8.32
C-SEGB3: Q42.1 U11.32
C-SEGB4: Q54.1 U14.32
C-SEGB5: Q66.1 U17.32
C-SEGB6: Q78.1 U20.32
C-SEGB7: Q90.1 U23.32
C-SEGB8: Q102.1 U26.32
C-SEGC: Q3.1 U2.12
C-SEGC1: Q19.1 U5.12
C-SEGC2: Q31.1 U8.12
C-SEGC3: Q43.1 U11.12
C-SEGC4: Q55.1 U14.12
C-SEGC5: Q67.1 U17.12
C-SEGC6: Q79.1 U20.12
C-SEGC7: Q91.1 U23.12
C-SEGC8: Q103.1 U26.12
C-SEGD: Q4.1 U2.10
C-SEGD1: Q20.1 U5.10
C-SEGD2: Q32.1 U8.10
C-SEGD3: Q44.1 U11.10
C-SEGD4: Q56.1 U14.10
C-SEGD5: Q68.1 U17.10
C-SEGD6: Q80.1 U20.10
C-SEGD7: Q92.1 U23.10
C-SEGD8: Q104.1 U26.10
C-SEGDP: Q8.1 U2.9
C-SEGDP1: Q24.1 U5.9
C-SEGDP2: Q36.1 U8.9
C-SEGDP3: Q48.1 U11.9
C-SEGDP4: Q60.1 U14.9
C-SEGDP5: Q72.1 U17.9
C-SEGDP6: Q84.1 U20.9
C-SEGDP7: Q96.1 U23.9
C-SEGDP8: Q108.1 U26.9
C-SEGE: Q5.1 U2.11
C-SEGE1: Q21.1 U5.11
C-SEGE2: Q33.1 U8.11
C-SEGE3: Q45.1 U11.11
C-SEGE4: Q57.1 U14.11
C-SEGE5: Q69.1 U17.11
C-SEGE6: Q81.1 U20.11
C-SEGE7: Q93.1 U23.11
C-SEGE8: Q105.1 U26.11
C-SEGF: Q6.1 U2.24
C-SEGF1: Q22.1 U5.24
C-SEGF2: Q34.1 U8.24
C-SEGF3: Q46.1 U11.24
C-SEGF4: Q58.1 U14.24
C-SEGF5: Q70.1 U17.24
C-SEGF6: Q82.1 U20.24
C-SEGF7: Q94.1 U23.24
C-SEGF8: Q106.1 U26.24
C-SEGG: Q7.1 U2.2
C-SEGG1: Q23.1 U5.2
C-SEGG2: Q35.1 U8.2
C-SEGG3: Q47.1 U11.2
C-SEGG4: Q59.1 U14.2
C-SEGG5: Q71.1 U17.2
C-SEGG6: Q83.1 U20.2
C-SEGG7: Q95.1 U23.2
C-SEGG8: Q107.1 U26.2
COUNTER: SJ1.1 U2.7
COUNTER1: SJ4.1 U5.7
COUNTER2: SJ6.1 U8.7
COUNTER3: SJ8.1 U11.7
COUNTER4: SJ10.1 U14.7
COUNTER5: SJ12.1 U17.7
COUNTER6: SJ14.1 U20.7
COUNTER7: SJ16.1 U23.7
COUNTER8: SJ18.1 U26.7
DIG1: Q9.3 U3.12
DIG2: Q10.3 U3.9
DIG3: Q11.3 U3.8
DIG4: Q12.3 U3.6
DIG5: Q14.3 U4.12
DIG6: Q15.3 U4.9
DIG7: Q16.3 U4.8
DIG8: Q17.3 U4.6
DIG9: Q26.3 U7.12
DIG10: Q27.3 U7.9
DIG11: Q28.3 U7.8
DIG12: Q29.3 U7.6
DIG13: Q38.3 U10.12
DIG14: Q39.3 U10.9
DIG15: Q40.3 U10.8
DIG16: Q41.3 U10.6
DIG17: Q50.3 U13.12
DIG18: Q51.3 U13.9
DIG19: Q52.3 U13.8
DIG20: Q53.3 U13.6
DIG21: Q62.3 U16.12
DIG22: Q63.3 U16.9
DIG23: Q64.3 U16.8
DIG24: Q65.3 U16.6
DIG25: Q74.3 U19.12
DIG26: Q75.3 U19.9
DIG27: Q76.3 U19.8
DIG28: Q77.3 U19.6
DIG29: Q86.3 U22.12
DIG30: Q87.3 U22.9
DIG31: Q88.3 U22.8
DIG32: Q89.3 U22.6
DIG33: Q98.3 U25.12
DIG34: Q99.3 U25.9
DIG35: Q100.3 U25.8
DIG36: Q101.3 U25.6
GND: C1.1 C4.1 C10.2 C13.C C19.C JP1.GND JP2.9 JP9.1 JP10.1 JP11.2 JP12.1 LED1.C Q9.2 Q10.2 Q11.2 Q12.2 SJ1.2 SJ2.2 U1.2 U2.3 U2.5 U2.21
GND1: C5.2 C6.C C7.1 C8.C C9.1 JP7.GND JP18.9 JP20.1 JP21.1 JP22.2 JP23.1 LED2.C Q14.2 Q15.2 Q16.2 Q17.2 SJ3.2 SJ4.2 U5.3 U5.5 U5.21 U6.2
GND2: C12.2 C14.C C15.1 C16.C C17.1 JP25.GND JP30.9 JP32.1 JP33.1 JP34.2 JP35.1 LED3.C Q26.2 Q27.2 Q28.2 Q29.2 SJ5.2 SJ6.2 U8.3 U8.5 U8.21 U9.2
GND3: C20.2 C21.C C22.1 C23.C C24.1 JP37.GND JP42.9 JP44.1 JP45.1 JP46.2 JP47.1 LED4.C Q38.2 Q39.2 Q40.2 Q41.2 SJ7.2 SJ8.2 U11.3 U11.5 U11.21 U12.2
GND4: C26.2 C27.C C28.1 C29.C C30.1 JP49.GND JP54.9 JP56.1 JP57.1 JP58.2 JP59.1 LED5.C Q50.2 Q51.2 Q52.2 Q53.2 SJ9.2 SJ10.2 U14.3 U14.5 U14.21 U15.2
GND5: C32.2 C33.C C34.1 C35.C C36.1 JP61.GND JP66.9 JP68.1 JP69.1 JP70.2 JP71.1 LED6.C Q62.2 Q63.2 Q64.2 Q65.2 SJ11.2 SJ12.2 U17.3 U17.5 U17.21 U18.2
GND6: C38.2 C39.C C40.1 C41.C C42.1 JP73.GND JP78.9 JP80.1 JP81.1 JP82.2 JP83.1 LED7.C Q74.2 Q75.2 Q76.2 Q77.2 SJ13.2 SJ14.2 U20.3 U20.5 U20.21 U21.2
GND7: C44.2 C45.C C46.1 C47.C C48.1 JP85.GND JP90.9 JP92.1 JP93.1 JP94.2 JP95.1 LED8.C Q86.2 Q87.2 Q88.2 Q89.2 SJ15.2 SJ16.2 U23.3 U23.5 U23.21 U24.2
GND8: C50.2 C51.C C52.1 C53.C C54.1 JP97.GND JP102.9 JP104.1 JP105.1 JP106.2 JP107.1 LED9.C Q98.2 Q99.2 Q100.2 Q101.2 SJ17.2 SJ18.2 U26.3 U26.5 U26.21 U27.2
N$1: Q1.3 R2.1
N$2: C2.1 JP7.DTR
N$3: C3.1 JP1.DTR
N$4: Q2.3 R3.1
N$5: Q3.3 R4.1
N$6: Q4.3 R5.1
N$7: Q5.3 R6.1
N$8: Q6.3 R7.1
N$9: Q7.3 R8.1
N$10: Q8.3 R9.1
N$11: C1.2 U2.20
N$12: LED2.A R12.1
N$13: Q13.3 R13.1
N$14: Q18.3 R14.1
N$15: Q19.3 R15.1
N$16: Q20.3 R16.1
N$17: Q21.3 R17.1
N$18: Q22.3 R18.1
N$19: Q23.3 R19.1
N$20: Q24.3 R20.1
N$21: C9.2 U5.20
N$22: C11.1 JP25.DTR
N$23: LED3.A R22.1
N$24: Q25.3 R23.1
N$25: Q30.3 R24.1
N$26: Q31.3 R25.1
N$27: Q32.3 R26.1
N$28: Q33.3 R27.1
N$29: Q34.3 R28.1
N$30: Q35.3 R29.1
N$31: Q36.3 R30.1
N$32: C17.2 U8.20
N$33: C18.1 JP37.DTR
N$34: LED4.A R32.1
N$35: Q37.3 R33.1
N$36: Q42.3 R34.1
N$37: Q43.3 R35.1
N$38: LED1.A R11.1
N$39: Q44.3 R36.1
N$40: Q45.3 R37.1
N$41: Q46.3 R38.1
N$42: Q47.3 R39.1
N$43: Q48.3 R40.1
N$44: C24.2 U11.20
N$45: C25.1 JP49.DTR
N$46: LED5.A R42.1
N$47: Q49.3 R43.1
N$48: Q54.3 R44.1
N$49: Q55.3 R45.1
N$50: Q56.3 R46.1
N$51: Q57.3 R47.1
N$52: Q58.3 R48.1
N$53: Q59.3 R49.1
N$54: Q60.3 R50.1
N$55: C30.2 U14.20
N$56: C31.1 JP61.DTR
N$57: LED6.A R52.1
N$58: Q61.3 R53.1
N$59: Q66.3 R54.1
N$60: Q67.3 R55.1
N$61: Q68.3 R56.1
N$62: Q69.3 R57.1
N$63: Q70.3 R58.1
N$64: Q71.3 R59.1
N$65: Q72.3 R60.1
N$66: C36.2 U17.20
N$67: C37.1 JP73.DTR
N$68: LED7.A R62.1
N$69: Q73.3 R63.1
N$70: Q78.3 R64.1
N$71: Q79.3 R65.1
N$72: Q80.3 R66.1
N$73: Q81.3 R67.1
N$74: Q82.3 R68.1
N$75: Q83.3 R69.1
N$76: Q84.3 R70.1
N$77: C42.2 U20.20
N$78: C43.1 JP85.DTR
N$79: LED8.A R72.1
N$80: Q85.3 R73.1
N$81: Q90.3 R74.1
N$82: Q91.3 R75.1
N$83: Q92.3 R76.1
N$84: Q93.3 R77.1
N$85: Q94.3 R78.1
N$86: Q95.3 R79.1
N$87: Q96.3 R80.1
N$88: C48.2 U23.20
N$89: C49.1 JP97.DTR
N$90: LED9.A R82.1
N$91: Q97.3 R83.1
N$92: Q102.3 R84.1
N$93: Q103.3 R85.1
N$94: Q104.3 R86.1
N$95: Q105.3 R87.1
N$96: Q106.3 R88.1
N$97: Q107.3 R89.1
N$98: Q108.3 R90.1
N$99: C54.2 U26.20
RAW [vcc]: C19.A JP2.10 JP11.1 JP12.2 U1.1 U1.3
RAW1 [vcc]: C8.A JP18.10 JP22.1 JP23.2 U6.1 U6.3
RAW2 [vcc]: C16.A JP30.10 JP34.1 JP35.2 U9.1 U9.3
RAW3 [vcc]: C23.A JP42.10 JP46.1 JP47.2 U12.1 U12.3
RAW4 [vcc]: C29.A JP54.10 JP58.1 JP59.2 U15.1 U15.3
RAW5 [vcc]: C35.A JP66.10 JP70.1 JP71.2 U18.1 U18.3
RAW6 [vcc]: C41.A JP78.10 JP82.1 JP83.2 U21.1 U21.3
RAW7 [vcc]: C47.A JP90.10 JP94.1 JP95.2 U24.1 U24.3
RAW8 [vcc]: C53.A JP102.10 JP106.1 JP107.2 U27.1 U27.3
RST: C3.2 JP8.1 R1.1 U2.29
RST1: C2.2 JP19.1 R10.1 U5.29
RST2: C11.2 JP31.1 R21.1 U8.29
RST3: C18.2 JP43.1 R31.1 U11.29
RST4: C25.2 JP55.1 R41.1 U14.29
RST5: C31.2 JP67.1 R51.1 U17.29
RST6: C37.2 JP79.1 R61.1 U20.29
RST7: C43.2 JP91.1 R71.1 U23.29
RST8: C49.2 JP103.1 R81.1 U26.29
RXI: JP1.TXO JP2.7 JP11.3 U2.30
RXI1: JP7.TXO JP18.7 JP22.3 U5.30
RXI2: JP25.TXO JP30.7 JP34.3 U8.30
RXI3: JP37.TXO JP42.7 JP46.3 U11.30
RXI4: JP49.TXO JP54.7 JP58.3 U14.30
RXI5: JP61.TXO JP66.7 JP70.3 U17.30
RXI6: JP73.TXO JP78.7 JP82.3 U20.30
RXI7: JP85.TXO JP90.7 JP94.3 U23.30
RXI8: JP97.TXO JP102.7 JP106.3 U26.30
SCK: JP2.1 U2.17
SCK1: JP18.1 U5.17
SCK2: JP30.1 U8.17
SCK3: JP42.1 U11.17
SCK4: JP54.1 U14.17
SCK5: JP66.1 U17.17
SCK6: JP78.1 U20.17
SCK7: JP90.1 U23.17
SCK8: JP102.1 U26.17
SCL: JP2.6 JP13.2 U2.28
SCL1: JP18.6 JP24.2 U5.28
SCL2: JP30.6 JP36.2 U8.28
SCL3: JP42.6 JP48.2 U11.28
SCL4: JP54.6 JP60.2 U14.28
SCL5: JP66.6 JP72.2 U17.28
SCL6: JP78.6 JP84.2 U20.28
SCL7: JP90.6 JP96.2 U23.28
SCL8: JP102.6 JP108.2 U26.28
SDA: JP2.5 JP13.1 U2.27
SDA1: JP18.5 JP24.1 U5.27
SDA2: JP30.5 JP36.1 U8.27
SDA3: JP42.5 JP48.1 U11.27
SDA4: JP54.5 JP60.1 U14.27
SDA5: JP66.5 JP72.1 U17.27
SDA6: JP78.5 JP84.1 U20.27
SDA7: JP90.5 JP96.1 U23.27
SDA8: JP102.5 JP108.1 U26.27
SDI: JP2.3 U2.15
SDI1: JP18.3 U5.15
SDI2: JP30.3 U8.15
SDI3: JP42.3 U11.15
SDI4: JP54.3 U14.15
SDI5: JP66.3 U17.15
SDI6: JP78.3 U20.15
SDI7: JP90.3 U23.15
SDI8: JP102.3 U26.15
SDO: JP2.2 U2.16
SDO1: JP18.2 U5.16
SDO2: JP30.2 U8.16
SDO3: JP42.2 U11.16
SDO4: JP54.2 U14.16
SDO5: JP66.2 U17.16
SDO6: JP78.2 U20.16
SDO7: JP90.2 U23.16
SDO8: JP102.2 U26.16
SEGA: R2.2 U3.11
SEGA1: R13.2 U4.11
SEGA2: R23.2 U7.11
SEGA3: R33.2 U10.11
SEGA4: R43.2 U13.11
SEGA5: R53.2 U16.11
SEGA6: R63.2 U19.11
SEGA7: R73.2 U22.11
SEGA8: R83.2 U25.11
SEGB: R3.2 U3.7
SEGB1: R14.2 U4.7
SEGB2: R24.2 U7.7
SEGB3: R34.2 U10.7
SEGB4: R44.2 U13.7
SEGB5: R54.2 U16.7
SEGB6: R64.2 U19.7
SEGB7: R74.2 U22.7
SEGB8: R84.2 U25.7
SEGC: R4.2 U3.4
SEGC1: R15.2 U4.4
SEGC2: R25.2 U7.4
SEGC3: R35.2 U10.4
SEGC4: R45.2 U13.4
SEGC5: R55.2 U16.4
SEGC6: R65.2 U19.4
SEGC7: R75.2 U22.4
SEGC8: R85.2 U25.4
SEGD: R5.2 U3.2
SEGD1: R16.2 U4.2
SEGD2: R26.2 U7.2
SEGD3: R36.2 U10.2
SEGD4: R46.2 U13.2
SEGD5: R56.2 U16.2
SEGD6: R66.2 U19.2
SEGD7: R76.2 U22.2
SEGD8: R86.2 U25.2
SEGDP: R9.2 U3.3
SEGDP1: R20.2 U4.3
SEGDP2: R30.2 U7.3
SEGDP3: R40.2 U10.3
SEGDP4: R50.2 U13.3
SEGDP5: R60.2 U16.3
SEGDP6: R70.2 U19.3
SEGDP7: R80.2 U22.3
SEGDP8: R90.2 U25.3
SEGE: R6.2 U3.1
SEGE1: R17.2 U4.1
SEGE2: R27.2 U7.1
SEGE3: R37.2 U10.1
SEGE4: R47.2 U13.1
SEGE5: R57.2 U16.1
SEGE6: R67.2 U19.1
SEGE7: R77.2 U22.1
SEGE8: R87.2 U25.1
SEGF: R7.2 U3.10
SEGF1: R18.2 U4.10
SEGF2: R28.2 U7.10
SEGF3: R38.2 U10.10
SEGF4: R48.2 U13.10
SEGF5: R58.2 U16.10
SEGF6: R68.2 U19.10
SEGF7: R78.2 U22.10
SEGF8: R88.2 U25.10
SEGG: R8.2 U3.5
SEGG1: R19.2 U4.5
SEGG2: R29.2 U7.5
SEGG3: R39.2 U10.5
SEGG4: R49.2 U13.5
SEGG5: R59.2 U16.5
SEGG6: R69.2 U19.5
SEGG7: R79.2 U22.5
SEGG8: R89.2 U25.5
TXO: JP1.RXI JP2.8 U2.31
TXO1: JP7.RXI JP18.8 U5.31
TXO2: JP25.RXI JP30.8 U8.31
TXO3: JP37.RXI JP42.8 U11.31
TXO4: JP49.RXI JP54.8 U14.31
TXO5: JP61.RXI JP66.8 U17.31
TXO6: JP73.RXI JP78.8 U20.31
TXO7: JP85.RXI JP90.8 U23.31
TXO8: JP97.RXI JP102.8 U26.31
VCC: C4.2 C10.1 C13.A JP1.VCC Q1.2 Q2.2 Q3.2 Q4.2 Q5.2 Q6.2 Q7.2 Q8.2 R1.2 R11.2 U1.5 U2.4 U2.6 U2.18
VCC1: C5.1 C6.A C7.2 JP7.VCC Q13.2 Q18.2 Q19.2 Q20.2 Q21.2 Q22.2 Q23.2 Q24.2 R10.2 R12.2 U5.4 U5.6 U5.18 U6.5
VCC2: C12.1 C14.A C15.2 JP25.VCC Q25.2 Q30.2 Q31.2 Q32.2 Q33.2 Q34.2 Q35.2 Q36.2 R21.2 R22.2 U8.4 U8.6 U8.18 U9.5
VCC3: C20.1 C21.A C22.2 JP37.VCC Q37.2 Q42.2 Q43.2 Q44.2 Q45.2 Q46.2 Q47.2 Q48.2 R31.2 R32.2 U11.4 U11.6 U11.18 U12.5
VCC4: C26.1 C27.A C28.2 JP49.VCC Q49.2 Q54.2 Q55.2 Q56.2 Q57.2 Q58.2 Q59.2 Q60.2 R41.2 R42.2 U14.4 U14.6 U14.18 U15.5
VCC5: C32.1 C33.A C34.2 JP61.VCC Q61.2 Q66.2 Q67.2 Q68.2 Q69.2 Q70.2 Q71.2 Q72.2 R51.2 R52.2 U17.4 U17.6 U17.18 U18.5
VCC6: C38.1 C39.A C40.2 JP73.VCC Q73.2 Q78.2 Q79.2 Q80.2 Q81.2 Q82.2 Q83.2 Q84.2 R61.2 R62.2 U20.4 U20.6 U20.18 U21.5
VCC7: C44.1 C45.A C46.2 JP85.VCC Q85.2 Q90.2 Q91.2 Q92.2 Q93.2 Q94.2 Q95.2 Q96.2 R71.2 R72.2 U23.4 U23.6 U23.18 U24.5
VCC8: C50.1 C51.A C52.2 JP97.VCC Q97.2 Q102.2 Q103.2 Q104.2 Q105.2 Q106.2 Q107.2 Q108.2 R81.2 R82.2 U26.4 U26.6 U26.18 U27.5

## Tracks (layer width: path | path; a pad name or v marks a point on that pad's centre or on a via)
!SS  (via drill 0.51)
  Top 0.203: U2.14 29.72,22.52 v29.72,22.1
  Bottom 0.203: v29.72,22.1 29.72,9.4 JP2.4
!SS1  (via drill 0.51)
  Top 0.203: U5.14 65.79,22.52 v65.79,22.1
  Bottom 0.203: v65.79,22.1 65.79,9.4 JP18.4
!SS2  (via drill 0.51)
  Top 0.203: U8.14 101.85,22.52 v101.85,22.1
  Bottom 0.203: v101.85,22.1 101.85,9.4 JP30.4
!SS3  (via drill 0.51)
  Top 0.203: U11.14 29.72,61.13 v29.72,60.71
  Bottom 0.203: v29.72,60.71 29.72,48.01 JP42.4
!SS4  (via drill 0.51)
  Top 0.203: U14.14 65.79,61.13 v65.79,60.71
  Bottom 0.203: v65.79,60.71 65.79,48.01 JP54.4
!SS5  (via drill 0.51)
  Top 0.203: U17.14 101.85,61.13 v101.85,60.71
  Bottom 0.203: v101.85,60.71 101.85,48.01 JP66.4
!SS6  (via drill 0.51)
  Top 0.203: U20.14 29.72,99.74 v29.72,99.31
  Bottom 0.203: v29.72,99.31 29.72,86.61 JP78.4
!SS7  (via drill 0.51)
  Top 0.203: U23.14 65.79,99.74 v65.79,99.31
  Bottom 0.203: v65.79,99.31 65.79,86.61 JP90.4
!SS8  (via drill 0.51)
  Top 0.203: U26.14 101.85,99.74 v101.85,99.31
  Bottom 0.203: v101.85,99.31 101.85,86.61 JP102.4
A1  (via drill 0.51)
  Top 0.203: U5.19 65.58,29.08 v67.06,29.08
  Bottom 0.203: JP20.2 69.6,33.53 67.06,30.99 v67.06,29.08
A2  (via drill 0.51)
  Top 0.203: U5.22 62.31,29.21 61.72,29.21 60.71,30.23 v60.71,32.26
  Bottom 0.203: JP21.2 49.28,33.53 50.55,32.26 v60.71,32.26
A3  (via drill 0.51)
  Top 0.203: U8.19 101.65,29.08 v103.12,29.08
  Bottom 0.203: JP32.2 105.66,33.53 103.12,30.99 v103.12,29.08
A4  (via drill 0.51)
  Top 0.203: U8.22 98.38,29.21 97.79,29.21 96.77,30.23 v96.77,32.26
  Bottom 0.203: JP33.2 85.34,33.53 86.61,32.26 v96.77,32.26
A5  (via drill 0.51)
  Top 0.203: U11.19 29.51,67.69 v30.99,67.69
  Bottom 0.203: JP44.2 33.53,72.14 30.99,69.6 v30.99,67.69
A6  (via drill 0.51)
  Top 0.203: U2.19 29.51,29.08 v30.99,29.08
  Bottom 0.203: JP9.2 33.53,33.53 30.99,30.99 v30.99,29.08
A7  (via drill 0.51)
  Top 0.203: U2.22 26.24,29.21 25.65,29.21 24.64,30.23 v24.64,32.26
  Bottom 0.203: JP10.2 13.21,33.53 14.48,32.26 v24.64,32.26
A8  (via drill 0.51)
  Top 0.203: U11.22 26.24,67.82 25.65,67.82 24.64,68.83 v24.64,70.87
  Bottom 0.203: JP45.2 13.21,72.14 14.48,70.87 v24.64,70.87
A9  (via drill 0.51)
  Top 0.203: U14.19 65.58,67.69 v67.06,67.69
  Bottom 0.203: JP56.2 69.6,72.14 67.06,69.6 v67.06,67.69
A10  (via drill 0.51)
  Top 0.203: U14.22 62.31,67.82 61.72,67.82 60.71,68.83 v60.71,70.87
  Bottom 0.203: JP57.2 49.28,72.14 50.55,70.87 v60.71,70.87
A11  (via drill 0.51)
  Top 0.203: U17.19 101.65,67.69 v103.12,67.69
  Bottom 0.203: JP68.2 105.66,72.14 103.12,69.6 v103.12,67.69
A12  (via drill 0.51)
  Top 0.203: U17.22 98.38,67.82 97.79,67.82 96.77,68.83 v96.77,70.87
  Bottom 0.203: JP69.2 85.34,72.14 86.61,70.87 v96.77,70.87
A13  (via drill 0.51)
  Top 0.203: U20.19 29.51,106.3 v30.99,106.3
  Bottom 0.203: JP80.2 33.53,110.74 30.99,108.2 v30.99,106.3
A14  (via drill 0.51)
  Top 0.203: U20.22 26.24,106.43 25.65,106.43 24.64,107.44 v24.64,109.47
  Bottom 0.203: JP81.2 13.21,110.74 14.48,109.47 v24.64,109.47
A15  (via drill 0.51)
  Top 0.203: U23.19 65.58,106.3 v67.06,106.3
  Bottom 0.203: JP92.2 69.6,110.74 67.06,108.2 v67.06,106.3
A16  (via drill 0.51)
  Top 0.203: U23.22 62.31,106.43 61.72,106.43 60.71,107.44 v60.71,109.47
  Bottom 0.203: JP93.2 49.28,110.74 50.55,109.47 v60.71,109.47
A17  (via drill 0.51)
  Top 0.203: U26.19 101.65,106.3 v103.12,106.3
  Bottom 0.203: JP104.2 105.66,110.74 103.12,108.2 v103.12,106.3
A18  (via drill 0.51)
  Top 0.203: U26.22 98.38,106.43 97.79,106.43 96.77,107.44 v96.77,109.47
  Bottom 0.203: JP105.2 85.34,110.74 86.61,109.47 v96.77,109.47
ANALOG  (via drill 0.51)
  Top 0.203: SJ2.1 v10.67,19.94 | U2.8 22.88,20.19 v22.1,20.19
  Bottom 0.203: v10.67,19.94 17.78,19.94 19.56,21.72 21.46,21.72 22.1,21.08 v22.1,20.19
ANALOG1  (via drill 0.51)
  Top 0.203: SJ3.1 v46.74,19.94 | U5.8 58.95,20.19 v58.17,20.19
  Bottom 0.203: v46.74,19.94 53.85,19.94 55.63,21.72 57.53,21.72 58.17,21.08 v58.17,20.19
ANALOG2  (via drill 0.51)
  Top 0.203: SJ5.1 v82.8,19.94 | U8.8 95.02,20.19 v94.23,20.19
  Bottom 0.203: v82.8,19.94 89.92,19.94 91.69,21.72 93.6,21.72 94.23,21.08 v94.23,20.19
ANALOG3  (via drill 0.51)
  Top 0.203: SJ7.1 v10.67,58.55 | U11.8 22.88,58.8 v22.1,58.8
  Bottom 0.203: v10.67,58.55 17.78,58.55 19.56,60.33 21.46,60.33 22.1,59.69 v22.1,58.8
ANALOG4  (via drill 0.51)
  Top 0.203: SJ9.1 v46.74,58.55 | U14.8 58.95,58.8 v58.17,58.8
  Bottom 0.203: v46.74,58.55 53.85,58.55 55.63,60.33 57.53,60.33 58.17,59.69 v58.17,58.8
ANALOG5  (via drill 0.51)
  Top 0.203: SJ11.1 v82.8,58.55 | U17.8 95.02,58.8 v94.23,58.8
  Bottom 0.203: v82.8,58.55 89.92,58.55 91.69,60.33 93.6,60.33 94.23,59.69 v94.23,58.8
ANALOG6  (via drill 0.51)
  Top 0.203: SJ13.1 v10.67,97.16 | U20.8 22.88,97.41 v22.1,97.41
  Bottom 0.203: v10.67,97.16 17.78,97.16 19.56,98.93 21.46,98.93 22.1,98.3 v22.1,97.41
ANALOG7  (via drill 0.51)
  Top 0.203: SJ15.1 v46.74,97.16 | U23.8 58.95,97.41 v58.17,97.41
  Bottom 0.203: v46.74,97.16 53.85,97.16 55.63,98.93 57.53,98.93 58.17,98.3 v58.17,97.41
ANALOG8  (via drill 0.51)
  Top 0.203: SJ17.1 v82.8,97.16 | U26.8 95.02,97.41 v94.23,97.41
  Bottom 0.203: v82.8,97.16 89.92,97.16 91.69,98.93 93.6,98.93 94.23,98.3 v94.23,97.41
C-DIG1  (via drill 0.51)
  Top 0.203: U2.13 27.18,23.93 v27.18,24.64 | Q9.1 33.85,32.45 34.8,31.5 v34.8,29.72
  Bottom 0.203: v34.8,29.72 34.8,29.21 34.04,28.45 34.04,26.42 32,24.38 27.43,24.38 v27.18,24.64
C-DIG2
  Top 0.203: U2.25 23.01,31.5 21.72,31.5 21.15,32.06 Q10.1
C-DIG3
  Top 0.203: U2.26 22.39,30.99 21.46,30.99 20.83,31.62 17.65,31.62 17.34,31.94 Q11.1
C-DIG4
  Top 0.203: U2.1 19.62,24.7 15.43,20.51 Q12.1
C-DIG5  (via drill 0.51)
  Top 0.203: U5.13 63.25,23.93 v63.25,24.64 | Q14.1 69.92,32.45 70.87,31.5 v70.87,29.72
  Bottom 0.203: v70.87,29.72 70.87,29.21 70.1,28.45 70.1,26.42 68.07,24.38 63.5,24.38 v63.25,24.64
C-DIG6
  Top 0.203: U5.25 59.08,31.5 57.78,31.5 57.22,32.06 Q15.1
C-DIG7
  Top 0.203: U5.26 58.45,30.99 57.53,30.99 56.9,31.62 53.72,31.62 53.41,31.94 Q16.1
C-DIG8
  Top 0.203: U5.1 55.69,24.7 51.5,20.51 Q17.1
C-DIG9  (via drill 0.51)
  Top 0.203: U8.13 99.31,23.93 v99.31,24.64 | Q26.1 105.98,32.45 106.93,31.5 v106.93,29.72
  Bottom 0.203: v106.93,29.72 106.93,29.21 106.17,28.45 106.17,26.42 104.14,24.38 99.57,24.38 v99.31,24.64
C-DIG10
  Top 0.203: U8.25 95.15,31.5 93.85,31.5 93.28,32.06 Q27.1
C-DIG11
  Top 0.203: U8.26 94.52,30.99 93.6,30.99 92.96,31.62 89.79,31.62 89.47,31.94 Q28.1
C-DIG12
  Top 0.203: U8.1 91.76,24.7 87.56,20.51 Q29.1
C-DIG13  (via drill 0.51)
  Top 0.203: U11.13 27.18,62.54 v27.18,63.25 | Q38.1 33.85,71.05 34.8,70.1 v34.8,68.33
  Bottom 0.203: v34.8,68.33 34.8,67.82 34.04,67.06 34.04,65.02 32,62.99 27.43,62.99 v27.18,63.25
C-DIG14
  Top 0.203: U11.25 23.01,70.1 21.72,70.1 21.15,70.67 Q39.1
C-DIG15
  Top 0.203: U11.26 22.39,69.6 21.46,69.6 20.83,70.23 17.65,70.23 17.34,70.55 Q40.1
C-DIG16
  Top 0.203: U11.1 19.62,63.31 15.43,59.12 Q41.1
C-DIG17  (via drill 0.51)
  Top 0.203: U14.13 63.25,62.54 v63.25,63.25 | Q50.1 69.92,71.05 70.87,70.1 v70.87,68.33
  Bottom 0.203: v70.87,68.33 70.87,67.82 70.1,67.06 70.1,65.02 68.07,62.99 63.5,62.99 v63.25,63.25
C-DIG18
  Top 0.203: U14.25 59.08,70.1 57.78,70.1 57.22,70.67 Q51.1
C-DIG19
  Top 0.203: U14.26 58.45,69.6 57.53,69.6 56.9,70.23 53.72,70.23 53.41,70.55 Q52.1
C-DIG20
  Top 0.203: U14.1 55.69,63.31 51.5,59.12 Q53.1
C-DIG21  (via drill 0.51)
  Top 0.203: U17.13 99.31,62.54 v99.31,63.25 | Q62.1 105.98,71.05 106.93,70.1 v106.93,68.33
  Bottom 0.203: v106.93,68.33 106.93,67.82 106.17,67.06 106.17,65.02 104.14,62.99 99.57,62.99 v99.31,63.25
C-DIG22
  Top 0.203: U17.25 95.15,70.1 93.85,70.1 93.28,70.67 Q63.1
C-DIG23
  Top 0.203: U17.26 94.52,69.6 93.6,69.6 92.96,70.23 89.79,70.23 89.47,70.55 Q64.1
C-DIG24
  Top 0.203: U17.1 91.76,63.31 87.56,59.12 Q65.1
C-DIG25  (via drill 0.51)
  Top 0.203: U20.13 27.18,101.15 v27.18,101.85 | Q74.1 33.85,109.66 34.8,108.71 v34.8,106.93
  Bottom 0.203: v34.8,106.93 34.8,106.43 34.04,105.66 34.04,103.63 32,101.6 27.43,101.6 v27.18,101.85
C-DIG26
  Top 0.203: U20.25 23.01,108.71 21.72,108.71 21.15,109.28 Q75.1
C-DIG27
  Top 0.203: U20.26 22.39,108.2 21.46,108.2 20.83,108.84 17.65,108.84 17.34,109.15 Q76.1
C-DIG28
  Top 0.203: U20.1 19.62,101.92 15.43,97.72 Q77.1
C-DIG29  (via drill 0.51)
  Top 0.203: U23.13 63.25,101.15 v63.25,101.85 | Q86.1 69.92,109.66 70.87,108.71 v70.87,106.93
  Bottom 0.203: v70.87,106.93 70.87,106.43 70.1,105.66 70.1,103.63 68.07,101.6 63.5,101.6 v63.25,101.85
C-DIG30
  Top 0.203: U23.25 59.08,108.71 57.78,108.71 57.22,109.28 Q87.1
C-DIG31
  Top 0.203: U23.26 58.45,108.2 57.53,108.2 56.9,108.84 53.72,108.84 53.41,109.15 Q88.1
C-DIG32
  Top 0.203: U23.1 55.69,101.92 51.5,97.72 Q89.1
C-DIG33  (via drill 0.51)
  Top 0.203: U26.13 99.31,101.15 v99.31,101.85 | Q98.1 105.98,109.66 106.93,108.71 v106.93,106.93
  Bottom 0.203: v106.93,106.93 106.93,106.43 106.17,105.66 106.17,103.63 104.14,101.6 99.57,101.6 v99.31,101.85
C-DIG34
  Top 0.203: U26.25 95.15,108.71 93.85,108.71 93.28,109.28 Q99.1
C-DIG35
  Top 0.203: U26.26 94.52,108.2 93.6,108.2 92.96,108.84 89.79,108.84 89.47,109.15 Q100.1
C-DIG36
  Top 0.203: U26.1 91.76,101.92 87.56,97.72 Q101.1
C-SEGA
  Top 0.254: U2.23 27.52,31.62 29.13,31.62 Q1.1
C-SEGA1
  Top 0.254: U5.23 63.59,31.62 65.2,31.62 Q13.1
C-SEGA2
  Top 0.254: U8.23 99.66,31.62 101.27,31.62 Q25.1
C-SEGA3
  Top 0.254: U11.23 27.52,70.23 29.13,70.23 Q37.1
C-SEGA4
  Top 0.254: U14.23 63.59,70.23 65.2,70.23 Q49.1
C-SEGA5
  Top 0.254: U17.23 99.66,70.23 101.27,70.23 Q61.1
C-SEGA6
  Top 0.254: U20.23 27.52,108.84 29.13,108.84 Q73.1
C-SEGA7
  Top 0.254: U23.23 63.59,108.84 65.2,108.84 Q85.1
C-SEGA8
  Top 0.254: U26.23 99.66,108.84 101.27,108.84 Q97.1
C-SEGB
  Top 0.203: Q2.1 13.53,32.19 17.91,27.81 18.77,27.81 U2.32
C-SEGB1
  Top 0.203: Q18.1 49.6,32.19 53.98,27.81 54.84,27.81 U5.32
C-SEGB2
  Top 0.203: Q30.1 85.66,32.19 90.04,27.81 90.91,27.81 U8.32
C-SEGB3
  Top 0.203: Q42.1 13.53,70.8 17.91,66.42 18.77,66.42 U11.32
C-SEGB4
  Top 0.203: Q54.1 49.6,70.8 53.98,66.42 54.84,66.42 U14.32
C-SEGB5
  Top 0.203: Q66.1 85.66,70.8 90.04,66.42 90.91,66.42 U17.32
C-SEGB6
  Top 0.203: Q78.1 13.53,109.41 17.91,105.03 18.77,105.03 U20.32
C-SEGB7
  Top 0.203: Q90.1 49.6,109.41 53.98,105.03 54.84,105.03 U23.32
C-SEGB8
  Top 0.203: Q102.1 85.66,109.41 90.04,105.03 90.91,105.03 U26.32
C-SEGC
  Top 0.203: U2.12 26.61,23.37 25.91,23.37 24.64,22.1 24.64,19.94 23.99,19.29 Q3.1
C-SEGC1
  Top 0.203: U5.12 62.68,23.37 61.98,23.37 60.71,22.1 60.71,19.94 60.05,19.29 Q19.1
C-SEGC2
  Top 0.203: U8.12 98.75,23.37 98.04,23.37 96.77,22.1 96.77,19.94 96.12,19.29 Q31.1
C-SEGC3
  Top 0.203: U11.12 26.61,61.98 25.91,61.98 24.64,60.71 24.64,58.55 23.99,57.9 Q43.1
C-SEGC4
  Top 0.203: U14.12 62.68,61.98 61.98,61.98 60.71,60.71 60.71,58.55 60.05,57.9 Q55.1
C-SEGC5
  Top 0.203: U17.12 98.75,61.98 98.04,61.98 96.77,60.71 96.77,58.55 96.12,57.9 Q67.1
C-SEGC6
  Top 0.203: U20.12 26.61,100.58 25.91,100.58 24.64,99.31 24.64,97.16 23.99,96.5 Q79.1
C-SEGC7
  Top 0.203: U23.12 62.68,100.58 61.98,100.58 60.71,99.31 60.71,97.16 60.05,96.5 Q91.1
C-SEGC8
  Top 0.203: U26.12 98.75,100.58 98.04,100.58 96.77,99.31 96.77,97.16 96.12,96.5 Q103.1
C-SEGD
  Top 0.203: U2.10 27.02,20.7 31.62,20.7 31.94,20.39 Q4.1
C-SEGD1
  Top 0.203: U5.10 63.09,20.7 67.69,20.7 68.01,20.39 Q20.1
C-SEGD2
  Top 0.203: U8.10 99.15,20.7 103.76,20.7 104.07,20.39 Q32.1
C-SEGD3
  Top 0.203: U11.10 27.02,59.31 31.62,59.31 31.94,58.99 Q44.1
C-SEGD4
  Top 0.203: U14.10 63.09,59.31 67.69,59.31 68.01,58.99 Q56.1
C-SEGD5
  Top 0.203: U17.10 99.15,59.31 103.76,59.31 104.07,58.99 Q68.1
C-SEGD6
  Top 0.203: U20.10 27.02,97.92 31.62,97.92 31.94,97.6 Q80.1
C-SEGD7
  Top 0.203: U23.10 63.09,97.92 67.69,97.92 68.01,97.6 Q92.1
C-SEGD8
  Top 0.203: U26.10 99.15,97.92 103.76,97.92 104.07,97.6 Q104.1
C-SEGDP
  Top 0.203: U2.9 26.39,20.19 27.81,20.19 28.13,19.88 Q8.1
C-SEGDP1
  Top 0.203: U5.9 62.46,20.19 63.88,20.19 64.2,19.88 Q24.1
C-SEGDP2
  Top 0.203: U8.9 98.53,20.19 99.95,20.19 100.26,19.88 Q36.1
C-SEGDP3
  Top 0.203: U11.9 26.39,58.8 27.81,58.8 28.13,58.49 Q48.1
C-SEGDP4
  Top 0.203: U14.9 62.46,58.8 63.88,58.8 64.2,58.49 Q60.1
C-SEGDP5
  Top 0.203: U17.9 98.53,58.8 99.95,58.8 100.26,58.49 Q72.1
C-SEGDP6
  Top 0.203: U20.9 26.39,97.41 27.81,97.41 28.13,97.09 Q84.1
C-SEGDP7
  Top 0.203: U23.9 62.46,97.41 63.88,97.41 64.2,97.09 Q96.1
C-SEGDP8
  Top 0.203: U26.9 98.53,97.41 99.95,97.41 100.26,97.09 Q108.1
C-SEGE
  Top 0.203: U2.11 27.58,21.27 34.99,21.27 35.75,20.51 Q5.1
C-SEGE1
  Top 0.203: U5.11 63.64,21.27 71.06,21.27 71.82,20.51 Q21.1
C-SEGE2
  Top 0.203: U8.11 99.71,21.27 107.12,21.27 107.88,20.51 Q33.1
C-SEGE3
  Top 0.203: U11.11 27.58,59.88 34.99,59.88 35.75,59.12 Q45.1
C-SEGE4
  Top 0.203: U14.11 63.64,59.88 71.06,59.88 71.82,59.12 Q57.1
C-SEGE5
  Top 0.203: U17.11 99.71,59.88 107.12,59.88 107.88,59.12 Q69.1
C-SEGE6
  Top 0.203: U20.11 27.58,98.49 34.99,98.49 35.75,97.73 Q81.1
C-SEGE7
  Top 0.203: U23.11 63.64,98.49 71.06,98.49 71.82,97.73 Q93.1
C-SEGE8
  Top 0.203: U26.11 99.71,98.49 107.12,98.49 107.88,97.73 Q105.1
C-SEGF
  Top 0.203: U2.24 26.23,31.46 Q6.1
C-SEGF1
  Top 0.203: U5.24 62.3,31.46 Q22.1
C-SEGF2
  Top 0.203: U8.24 98.36,31.46 Q34.1
C-SEGF3
  Top 0.203: U11.24 26.23,70.07 Q46.1
C-SEGF4
  Top 0.203: U14.24 62.3,70.07 Q58.1
C-SEGF5
  Top 0.203: U17.24 98.36,70.07 Q70.1
C-SEGF6
  Top 0.203: U20.24 26.23,108.67 Q82.1
C-SEGF7
  Top 0.203: U23.24 62.3,108.67 Q94.1